# Altium PCB AudioPCB.PcbDoc (part 1 of 2)
Units mm, origin at the board's own origin, x right, y up, seen from the top; angles counter-clockwise.
Board outline 80 x 60 mm, 4 copper layers (Top Layer, GND, Power, Bottom Layer), stack 1.586 mm thick; 193 components, 130 nets, 539 pads, 148 vias.
Unrouted connection lines stored in the file: 1.
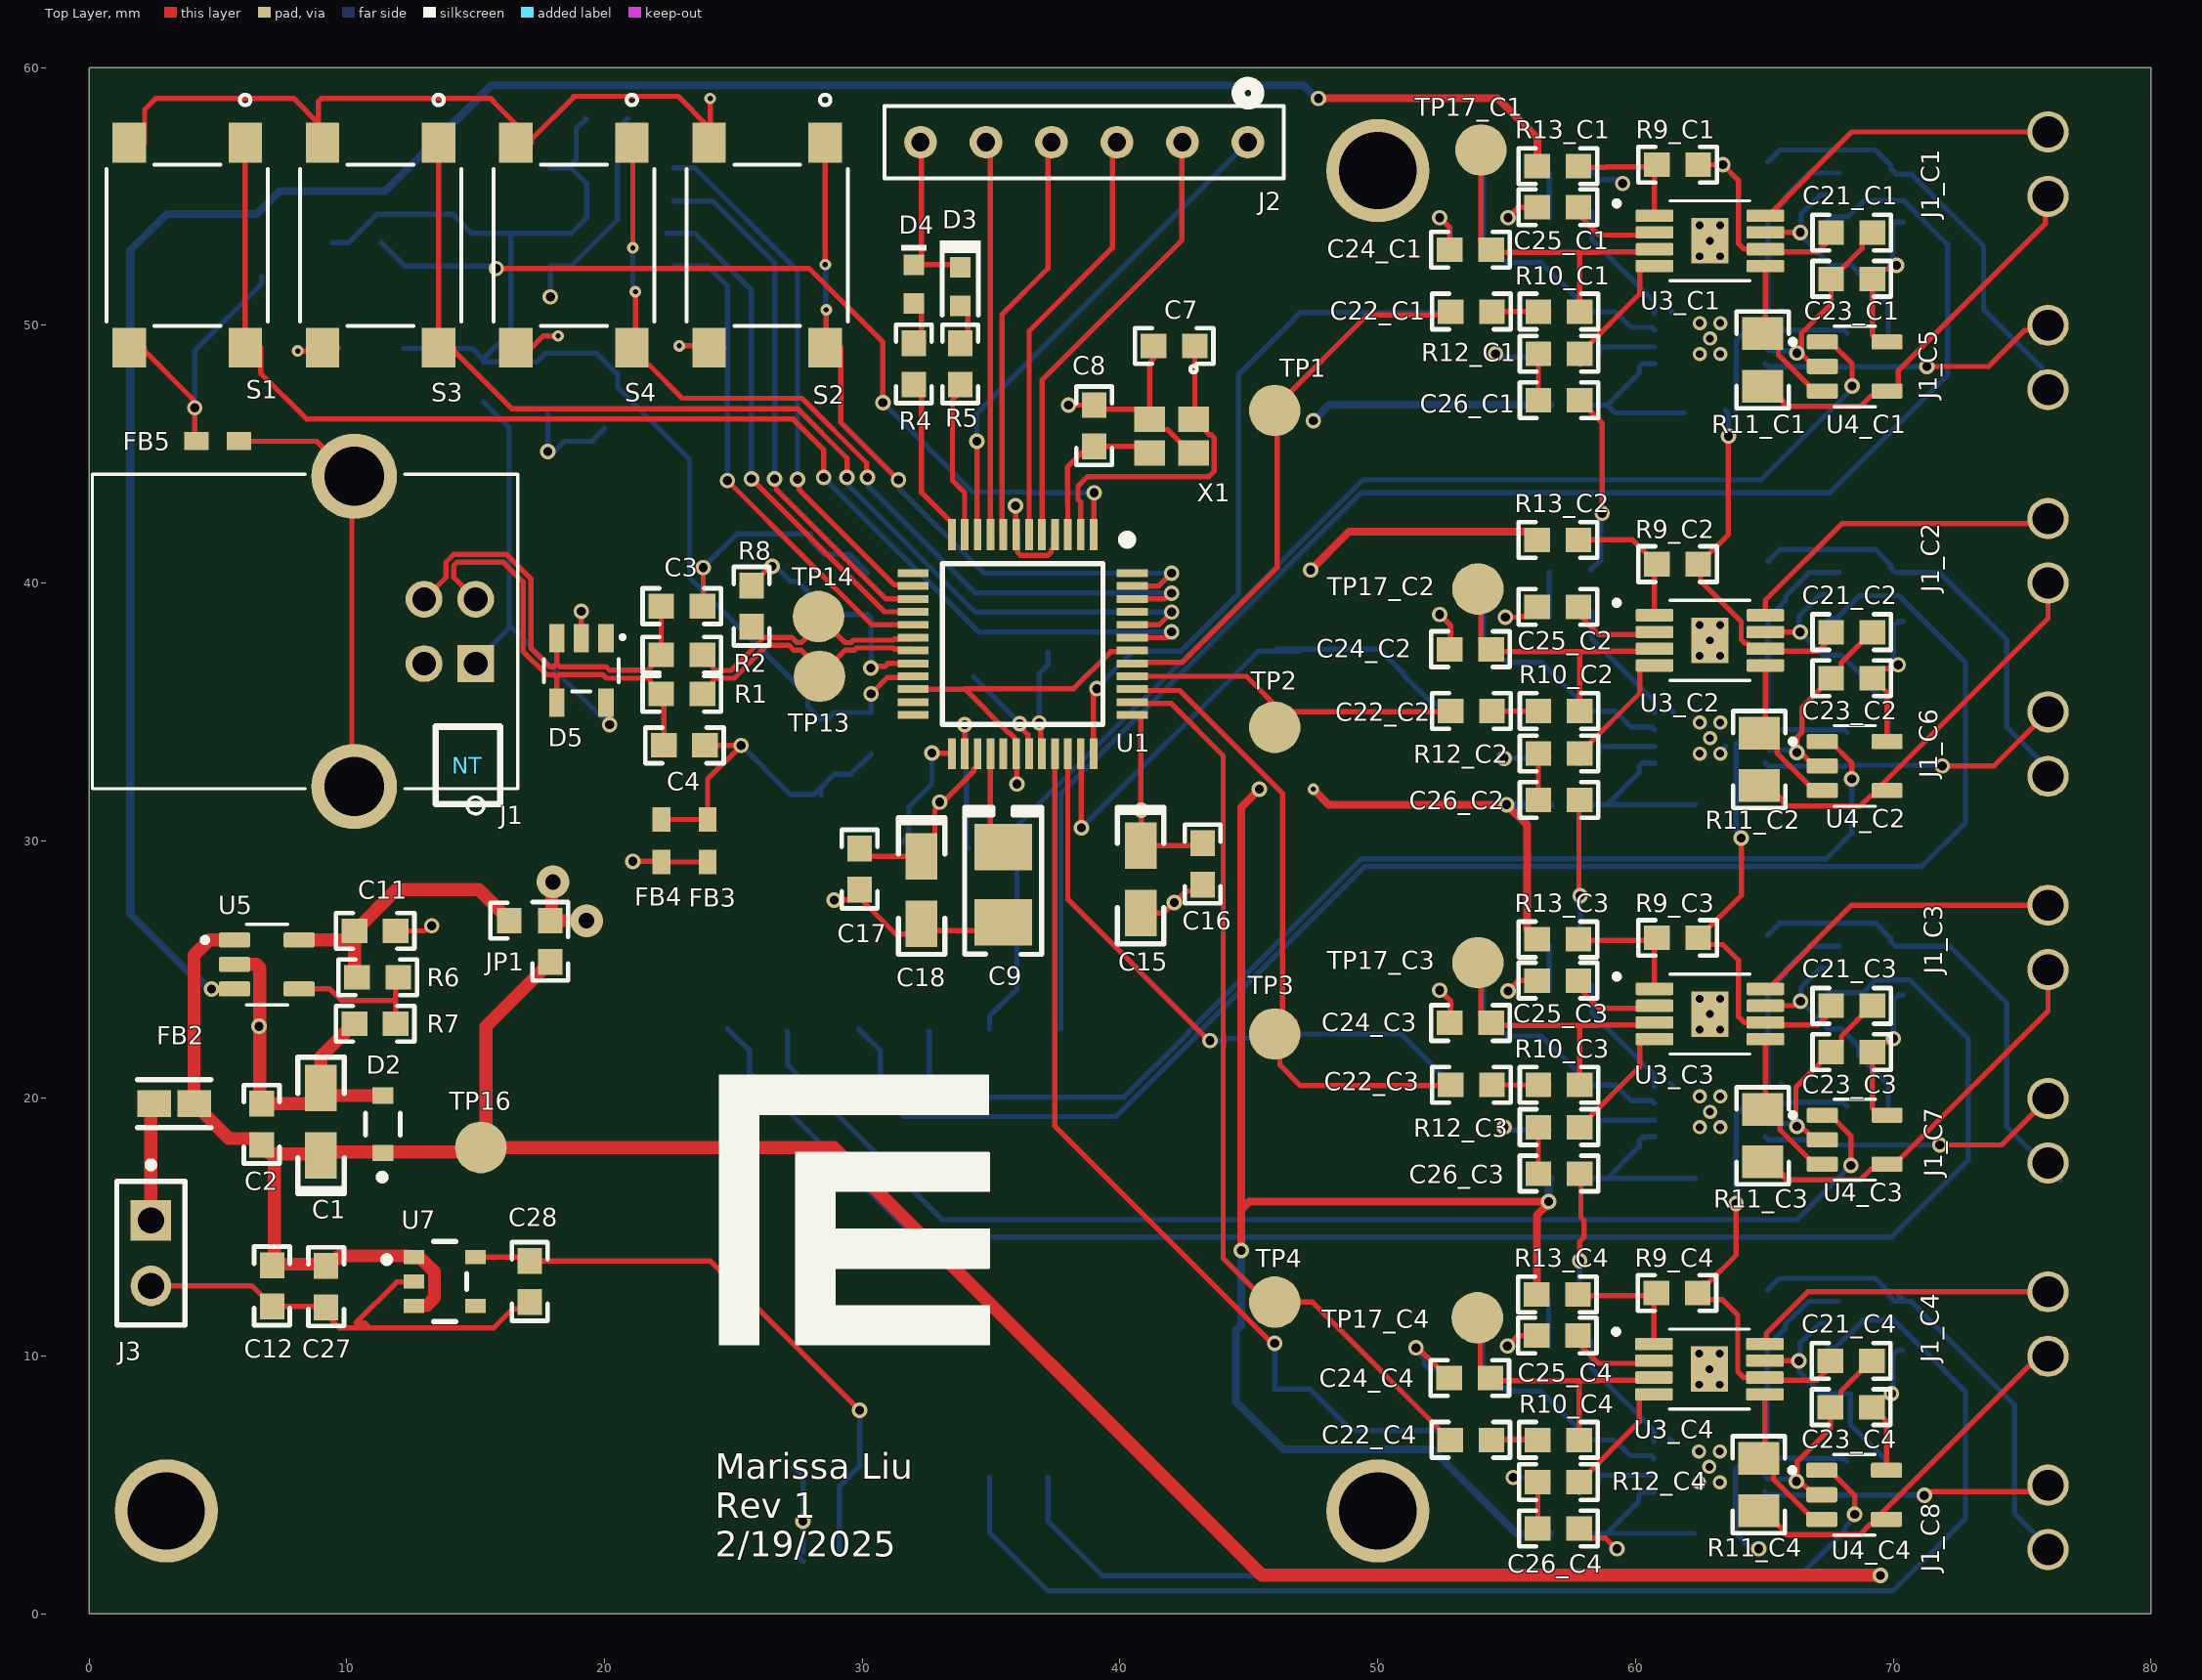
[diagram p0: Top Layer view]
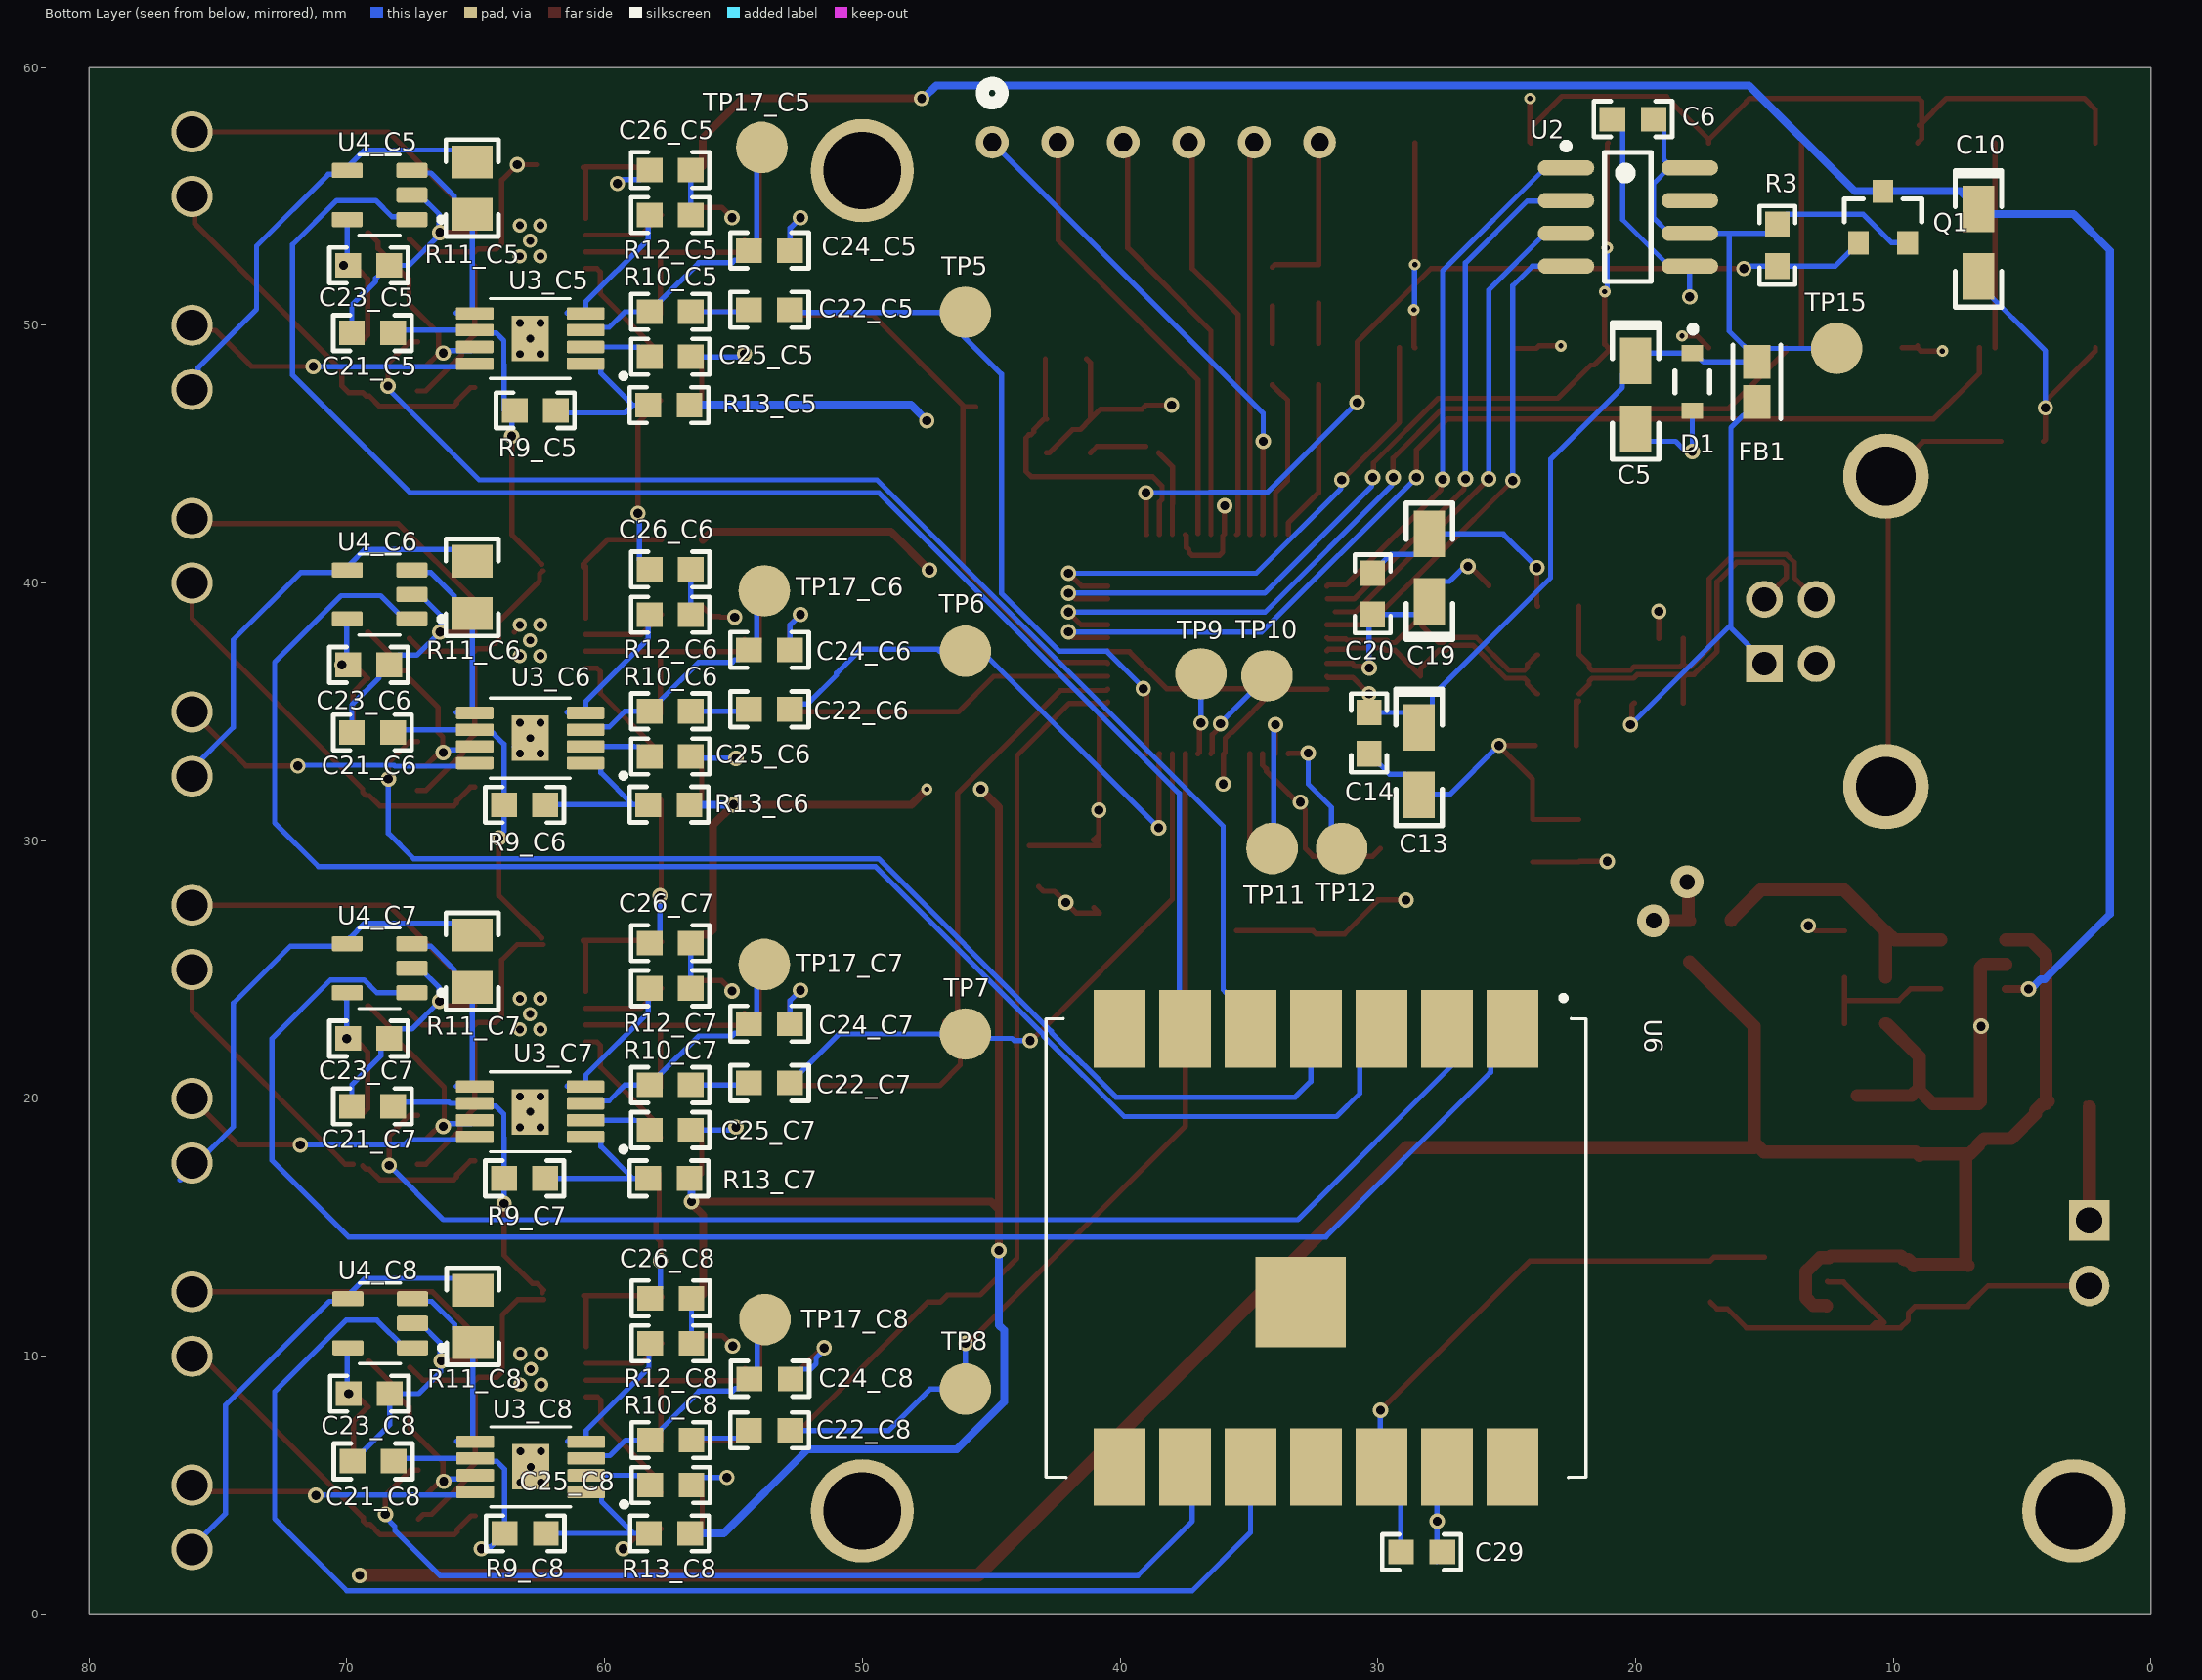
[diagram p1: Bottom Layer view, seen from below]
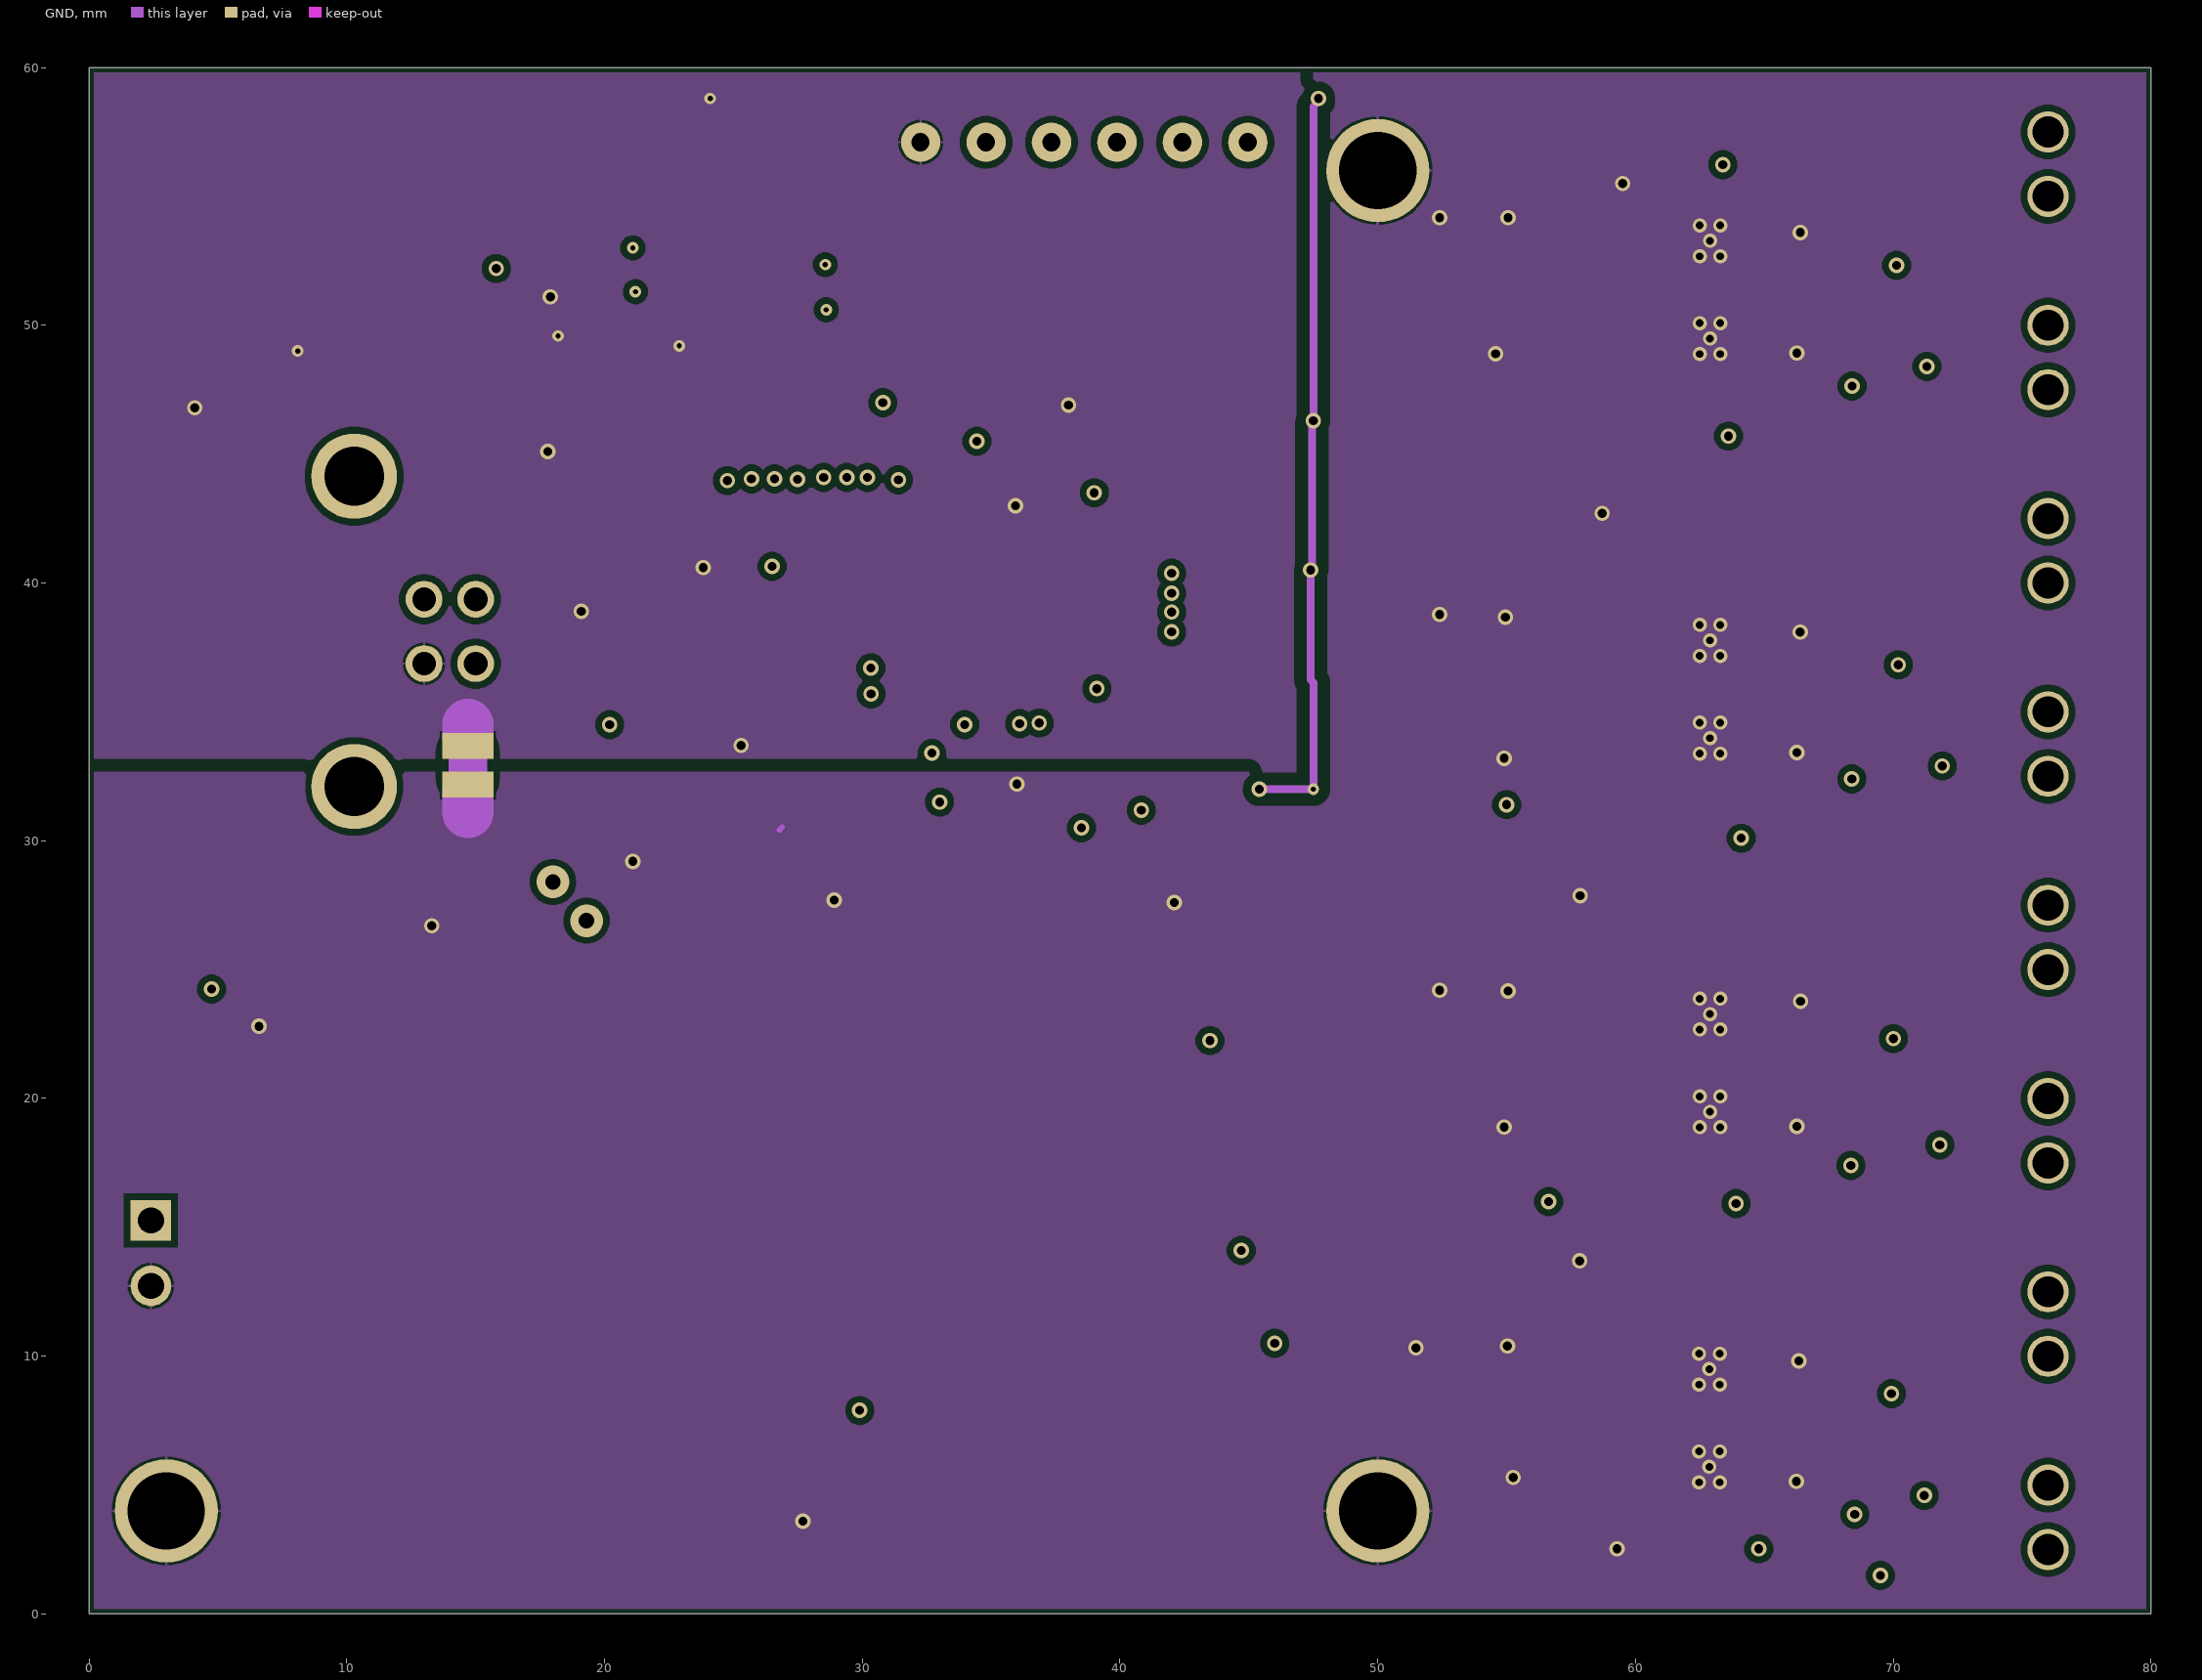
[diagram p2: GND]
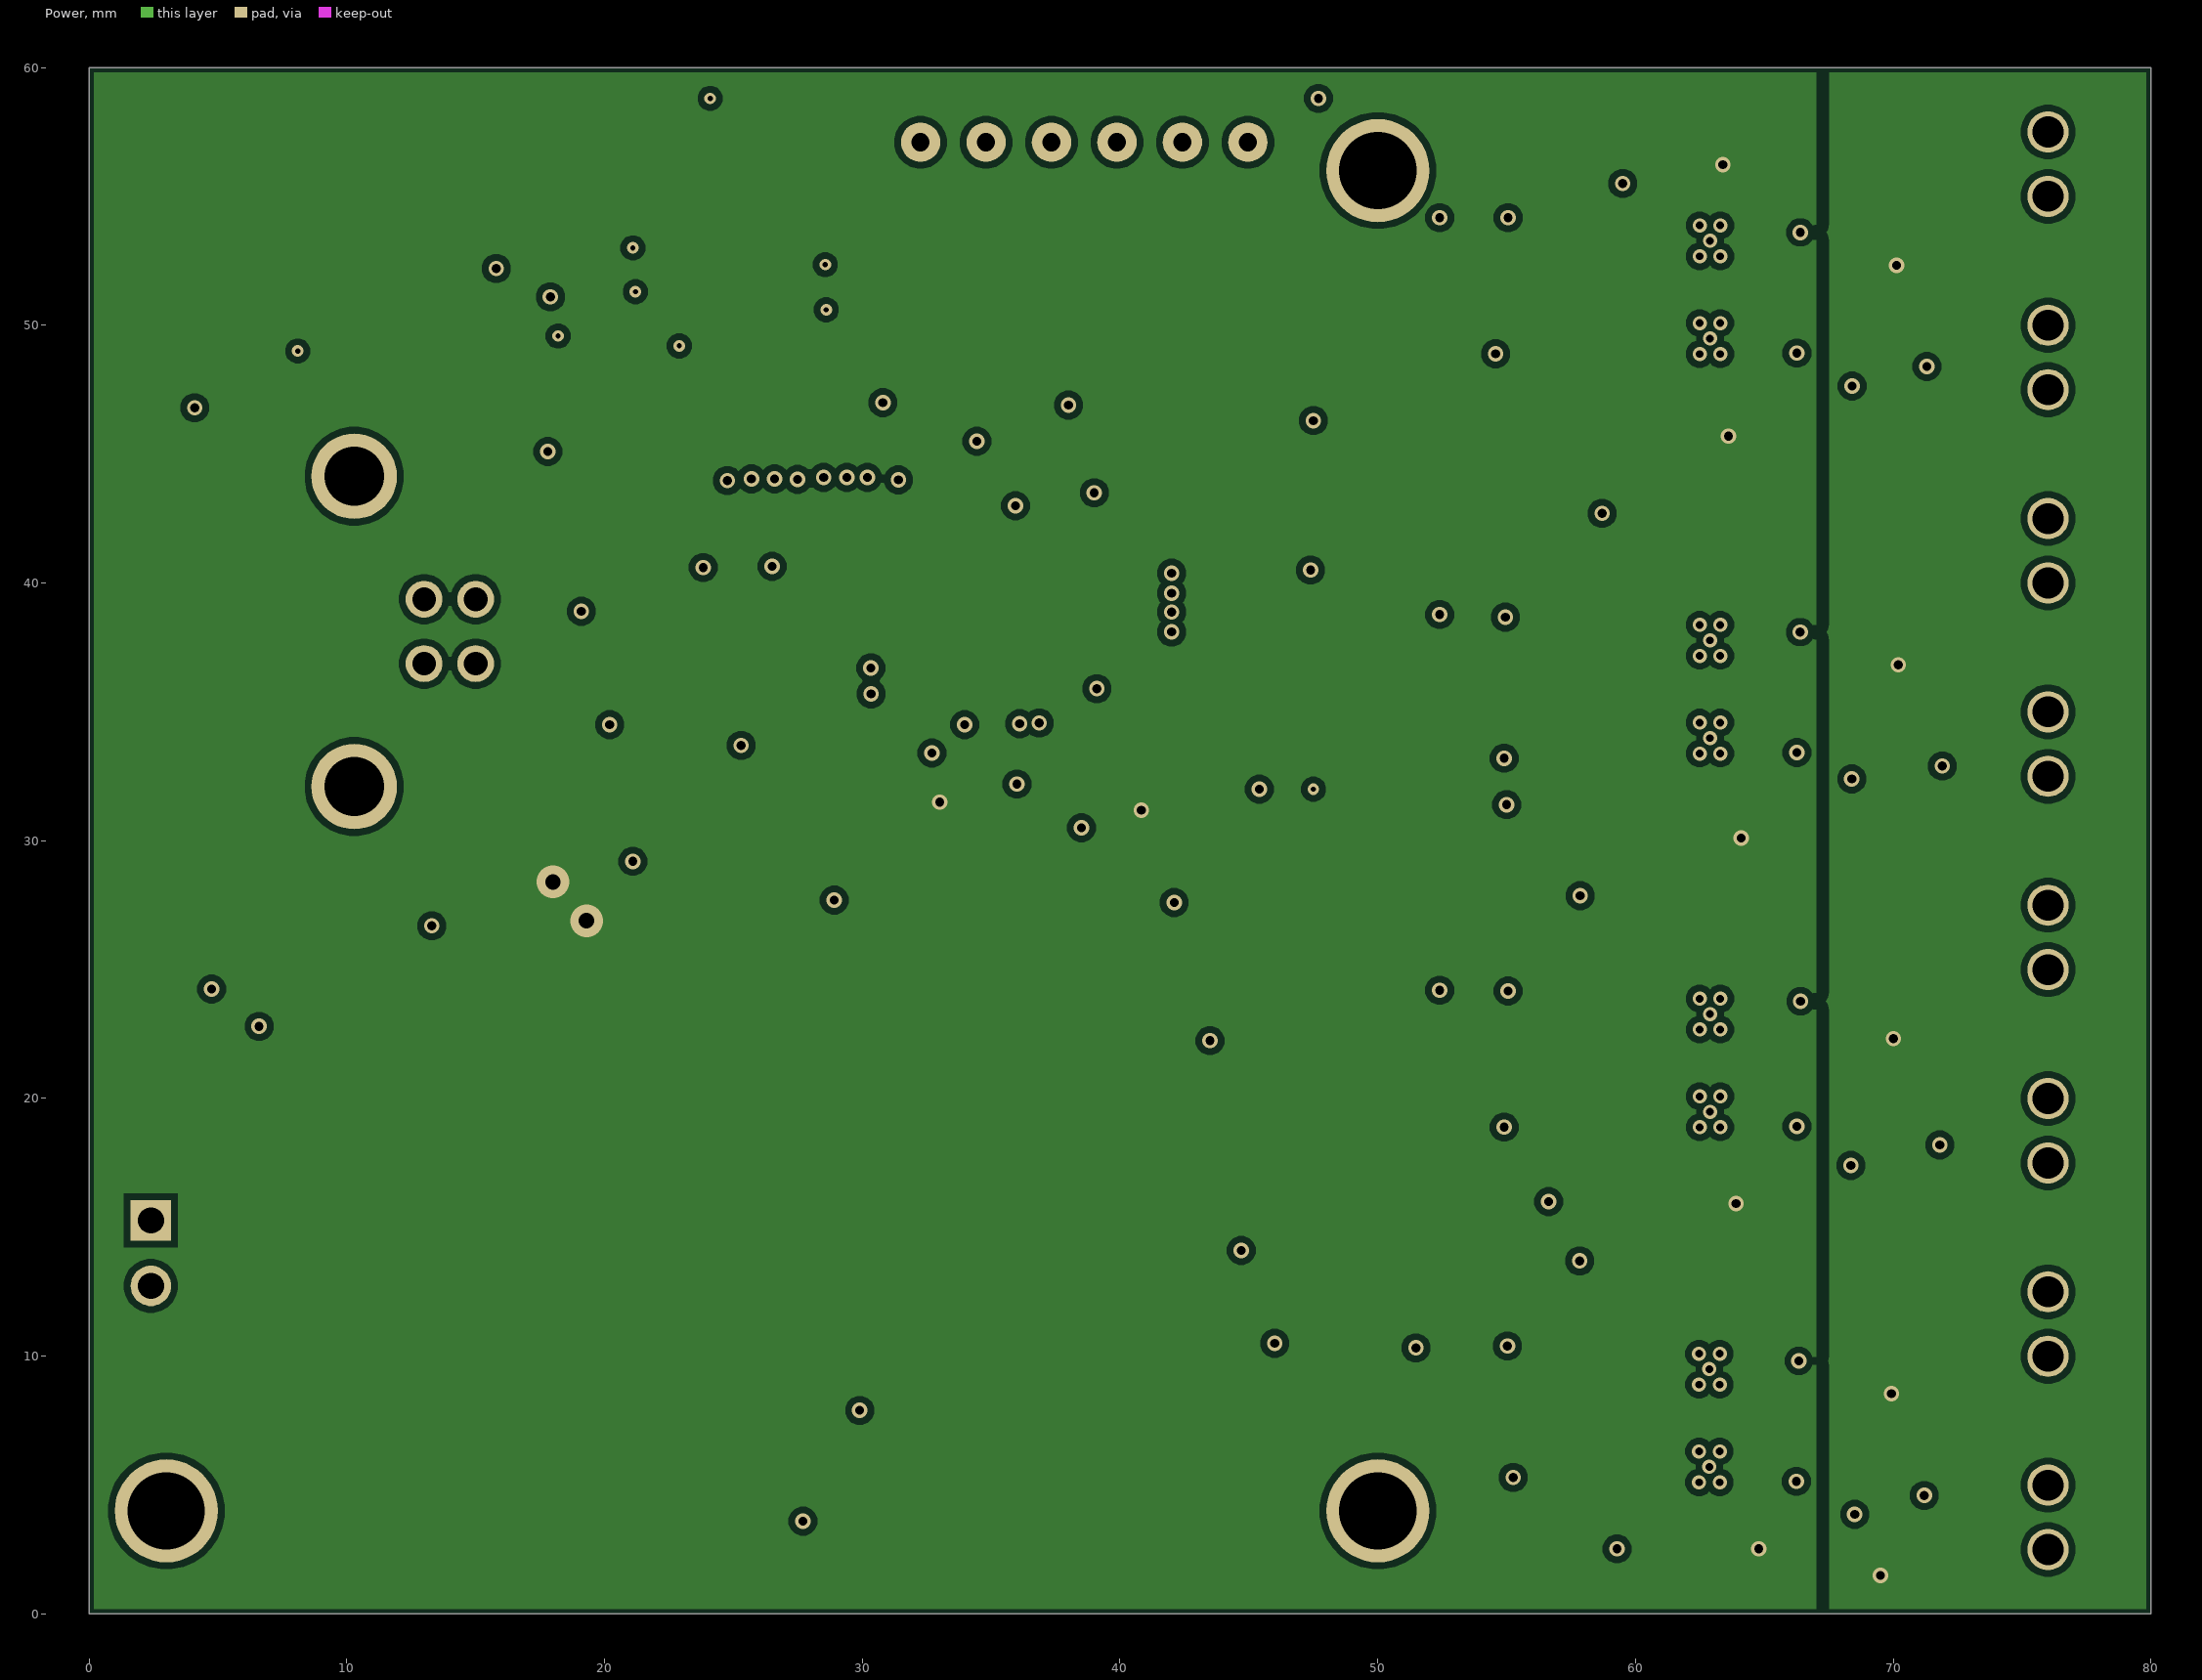
[diagram p3: Power]

## Layer stack, top to bottom
Top Solder: solder mask 0.0305, Solder Resist, Dk 3.8
Top Layer: signal copper 0.035
Dielectric 2: prepreg 0.2104, PP-006, Dk 4.4
GND: signal copper 0.0152
Dielectric 1: core 1.065, Dk 4.6
Power: signal copper 0.0152
Dielectric 3: prepreg 0.2104, PP-006, Dk 4.4
Bottom Layer: signal copper 0.035
Bottom Solder: solder mask 0.0305, Solder Resist, Dk 3.8

## Board outline
0,0 0,60 80,60 80,0

## Design rules (kind name [scope] priority, off if disabled: settings)
BoardOutlineClearance [All] p1: gap=0.2 ignorepadtopadclearanceinfootprint=FALSE
Clearance POLYGONCLEARANCE [InNamedPolygon('AVDD5V')or InNamedPolygon('AMP') or InNamedPolygon('AGND') or InNamedPolygon('DGND')] p1: gap=0.254 ignorepadtopadclearanceinfootprint=TRUE except(0: SMDPad-Fill SMDPad-Poly SMDPad-Region; 0.5: Arc-Fill Arc-Poly Arc-Region Track-Fill Track-Poly Track-Region Fill-Fill Fill-Poly Fill-Region Poly-Poly Poly-Region Region-Region)
Clearance [All] p2: gap=0.102 ignorepadtopadclearanceinfootprint=FALSE except(0.127: Arc-Via Track-Via SMDPad-Via THPad-Via Via-Via Via-Fill Via-Poly Via-Region Via-Text; 0.25: Arc-Hole Track-Hole SMDPad-Hole THPad-Hole Via-Hole Fill-Hole Poly-Hole Region-Hole Text-Hole)
ComponentClearance [All] p1: gap=0.102 collisioncheckmode=3 verticalgap=0.102 showdistances=TRUE
DiffPairsRouting [All] p1: maxlimit=0.102 minlimit=0.102 mostfreqgap=0.102 toplayer_minwidth=0.102 toplayer_maxwidth=1816.048 toplayer_prefwidth=0.102 midlayer1_minwidth=0.102 midlayer1_maxwidth=1816.048 midlayer1_prefwidth=0.102 midlayer2_minwidth=0.102 midlayer2_maxwidth=1816.048 midlayer2_prefwidth=0.102 bottomlayer_minwidth=0.102 bottomlayer_maxwidth=1816.048 bottomlayer_prefwidth=0.102 maxuncoupledlength=12.7
Height [All] p1: minheight=0 maxheight=1816.048 prefheight=12.7
HoleSize [All] p1: absolutevalues=TRUE maxlimit=6.3 minlimit=0.2 maxpercent=80.000 minpercent=20.000
HoleToHoleClearance [All] p1: gap=0.25 allowstackedmicrovias=FALSE
MinimumAnnularRing [All] p1: minimumring=0.076
MinimumSolderMaskSliver [All] p1: minsoldermaskwidth=0
PlaneClearance [All] p1: clearance=0.102
PlaneConnect PlaneConnectPowerPads [InPadClass('PowerPads')] p1: planeconnectstyle=Direct reliefexpansion=0.508 reliefentries=4 reliefconductorwidth=0.254 reliefairgap=0.254
PlaneConnect [All] p2: pad.planeconnectstyle=Relief pad.reliefexpansion=0.3 pad.reliefentries=4 pad.reliefconductorwidth=0.102 pad.reliefairgap=0.102 via.planeconnectstyle=Direct via.reliefexpansion=0.3 via.reliefentries=4 via.reliefconductorwidth=0.127 via.reliefairgap=0.127
PolygonConnect PolygonConnectPowerPads [All vs (InPadClass('PowerPads'))] p1: connectstyle=Direct reliefconductorwidth=0.254 reliefentries=4 polygonreliefangle="90 Angle" airgapwidth=0.254
PolygonConnect [All] p2: thpad.connectstyle=Relief thpad.reliefconductorwidth=0.102 thpad.reliefentries=4 thpad.polygonreliefangle="90 Angle" thpad.airgapwidth=0.102 smdpad.connectstyle=Relief smdpad.reliefconductorwidth=0.102 smdpad.reliefentries=4 smdpad.polygonreliefangle="90 Angle" smdpad.airgapwidth=0.102 via.connectstyle=Direct via.reliefconductorwidth=0.127 via.reliefentries=4 via.polygonreliefangle="90 Angle" via.airgapwidth=0.127
RoutingVias [All] p1: holewidth=0.2 width=0.45 viastyle="Through Hole" minholewidth=0.2 minwidth=0.45 maxholewidth=6.3 maxwidth=6.55
SMDToPlane [InNet('No Net')] p1: distance=0
SilkToSilkClearance [All] p1: silktosilkclearance=0
SilkToSolderMaskClearance [IsPad] p1: minsilkscreentomaskgap=0.102 clearancetoexposedcopper=TRUE
SolderMaskExpansion [All] p1: expansion=0.075 istentingtop=FALSE
SupplyNets "Schematic Supply Nets_7" [InNet('DGND')] p1: voltage=0.000
SupplyNets "Schematic Supply Nets_6" [InNet('AVDD5V')] p2: voltage=0.000
SupplyNets "Schematic Supply Nets_5" [InNet('4V')] p3: voltage=0.000
SupplyNets "Schematic Supply Nets_3" [InNet('AMP')] p4: voltage=0.000
SupplyNets "Schematic Supply Nets_2" [InNet('3V3')] p5: voltage=0.000
SupplyNets "Schematic Supply Nets_1" [InNet('DVDD5V')] p6: voltage=0.000
SupplyNets "Schematic Supply Nets" [InNet('AGND')] p7: voltage=0.000
Width [All] p1: maxlimit=1816.048 minlimit=0.102 preferedwidth=0.102
20 further rules are at their usual default settings.

## Classes and differential pairs
channel class "AB Amplifier": C1 C2 C3 C4 C5 C6 C7 C8
net class LINE_OUT[1..8]: LINE_OUT1 LINE_OUT2 LINE_OUT3 LINE_OUT4 LINE_OUT5 LINE_OUT6 LINE_OUT7 LINE_OUT8
net class CUR_SENSE[1..8]: CUR_SENSE1 CUR_SENSE2 CUR_SENSE3 CUR_SENSE4 CUR_SENSE5 CUR_SENSE6 CUR_SENSE7 CUR_SENSE8
component class USB: C1 C2 C3 C4 C5 D1 D2 D5 FB1 FB2 FB3 FB4 FB5 J1 J3 R1 R2 R8 TP13 TP14
component class Power: C10 C11 C12 C27 C28 JP1 Q1 R3 R6 R7 TP15 TP16 U5 U7
component class Designator: C29 U6
component class CM6206: C6 C7 C8 C9 C13 C14 C15 C16 C17 C18 C19 C20 D3 D4 J2 NT R4 R5 S1 S2 S3 S4 TP1 TP2 TP3 TP4 TP5 TP6 TP7 TP8 TP9 TP10 TP11 TP12 U1 U2 X1
component class C8: C21_C8 C22_C8 C23_C8 C24_C8 C25_C8 C26_C8 J1_C8 R9_C8 R10_C8 R11_C8 R12_C8 R13_C8 TP17_C8 U3_C8 U4_C8
component class C7: C21_C7 C22_C7 C23_C7 C24_C7 C25_C7 C26_C7 J1_C7 R9_C7 R10_C7 R11_C7 R12_C7 R13_C7 TP17_C7 U3_C7 U4_C7
component class C6: C21_C6 C22_C6 C23_C6 C24_C6 C25_C6 C26_C6 J1_C6 R9_C6 R10_C6 R11_C6 R12_C6 R13_C6 TP17_C6 U3_C6 U4_C6
component class C5: C21_C5 C22_C5 C23_C5 C24_C5 C25_C5 C26_C5 J1_C5 R9_C5 R10_C5 R11_C5 R12_C5 R13_C5 TP17_C5 U3_C5 U4_C5
component class C4: C21_C4 C22_C4 C23_C4 C24_C4 C25_C4 C26_C4 J1_C4 R9_C4 R10_C4 R11_C4 R12_C4 R13_C4 TP17_C4 U3_C4 U4_C4
component class C3: C21_C3 C22_C3 C23_C3 C24_C3 C25_C3 C26_C3 J1_C3 R9_C3 R10_C3 R11_C3 R12_C3 R13_C3 TP17_C3 U3_C3 U4_C3
component class C2: C21_C2 C22_C2 C23_C2 C24_C2 C25_C2 C26_C2 J1_C2 R9_C2 R10_C2 R11_C2 R12_C2 R13_C2 TP17_C2 U3_C2 U4_C2
component class C1: C21_C1 C22_C1 C23_C1 C24_C1 C25_C1 C26_C1 J1_C1 R9_C1 R10_C1 R11_C1 R12_C1 R13_C1 TP17_C1 U3_C1 U4_C1
differential pair USB_RAW: +USB_RAW_P -USB_RAW_N
differential pair USB: +USB_P -USB_N

## Components (designator, comment, footprint, x,y, rotation, side; value= is the part's Value field where it differs from the comment)
C1 "10µF" "1206 TANT CASE A" 9,19.1 r90 top
C2 "0.1uF" 0603 6.7,19 r270 top
C3 "0.1uF" 0603 23,39.1 r180 top
C4 "0.1uF" 0603 23.1,33.7 r180 top
C5 "10µF" "1206 TANT CASE A" 20,47.3 r270 bottom
C6 ".1uF" 0603 20.1,58 r180 bottom
C7 "6pF" 0603 42.1,49.2 r0 top
C8 "6pF" 0603 39,46.1 r270 top
C9 "22 µF" "CAP POL 1411_3528" 35.473,28.3 r270 top
C10 "10µF" "1206 TANT CASE A" 6.7,53.2 r270 bottom
C11 "2.2uF" 0603 11.1,26.5 r180 top
C12 "1uF" 0603 7.1,12.73 r90 top
C13 "10µF" "1206 TANT CASE A" 28.4,33.09 r270 bottom
C14 "0.1uF" 0603 30.342,34.178 r90 bottom
C15 "10uF" "1206 TANT CASE A" 40.8,28.5 r270 top
C16 "0.1uF" 0603 43.2,29.1 r90 top
C17 "0.1uF" 0603 29.9,28.9 r90 top
C18 "10uF" "1206 TANT CASE A" 32.3,28.09 r270 top
C19 "10µF" "1206 TANT CASE A" 28,40.6 r90 bottom
C20 "0.1uF" 0603 30.2,39.58 r270 bottom
C21_C1 "1uF" 0603 68.385,53.594 r180 top (schematic designator C21)
C21_C2 "1uF" 0603 68.385,38.094 r180 top (schematic designator C21)
C21_C3 "1uF" 0603 68.385,23.594 r180 top (schematic designator C21)
C21_C4 "1uF" 0603 68.363,9.82 r180 top (schematic designator C21)
C21_C5 "1uF" 0603 69,49.7 r180 bottom (schematic designator C21)
C21_C6 "1uF" 0603 69,34.2 r180 bottom (schematic designator C21)
C21_C7 "1uF" 0603 69,19.7 r180 bottom (schematic designator C21)
C21_C8 "1uF" 0603 68.978,5.926 r180 bottom (schematic designator C21)
C22_C1 "1uF" 0603 53.629,50.531 r0 top (schematic designator C22)
C22_C2 "1uF" 0603 53.629,35.031 r0 top (schematic designator C22)
C22_C3 "1uF" 0603 53.629,20.531 r0 top (schematic designator C22)
C22_C4 "1uF" 0603 53.607,6.756 r0 top (schematic designator C22)
C22_C5 "1uF" 0603 53.6,50.6 r0 bottom (schematic designator C22)
C22_C6 "1uF" 0603 53.6,35.1 r0 bottom (schematic designator C22)
C22_C7 "1uF" 0603 53.6,20.6 r0 bottom (schematic designator C22)
C22_C8 "1uF" 0603 53.593,7.124 r0 bottom (schematic designator C22)
C23_C1 "1uF" 0603 68.385,51.8 r0 top (schematic designator C23)
C23_C2 "1uF" 0603 68.385,36.3 r0 top (schematic designator C23)
C23_C3 "1uF" 0603 68.385,21.8 r0 top (schematic designator C23)
C23_C4 "1uF" 0603 68.363,8.026 r0 top (schematic designator C23)
C23_C5 "1uF" 0603 69.15,52.325 r0 bottom (schematic designator C23)
C23_C6 "1uF" 0603 69.15,36.825 r0 bottom (schematic designator C23)
C23_C7 "1uF" 0603 69.15,22.325 r0 bottom (schematic designator C23)
C23_C8 "1uF" 0603 69.128,8.551 r0 bottom (schematic designator C23)
C24_C1 "1uF" 0603 53.593,52.931 r0 top (schematic designator C24)
C24_C2 "1uF" 0603 53.593,37.431 r0 top (schematic designator C24)
C24_C3 "1uF" 0603 53.593,22.931 r0 top (schematic designator C24)
C24_C4 "1uF" 0603 53.57,9.156 r0 top (schematic designator C24)
C24_C5 "1uF" 0603 53.6,52.9 r0 bottom (schematic designator C24)
C24_C6 "1uF" 0603 53.6,37.4 r0 bottom (schematic designator C24)
C24_C7 "1uF" 0603 53.6,22.9 r0 bottom (schematic designator C24)
C24_C8 "1uF" 0603 53.578,9.126 r0 bottom (schematic designator C24)
C25_C1 "1uF" 0603 56.985,54.574 r0 top (schematic designator C25)
C25_C2 "1uF" 0603 56.985,39.074 r0 top (schematic designator C25)
C25_C3 "1uF" 0603 56.985,24.574 r0 top (schematic designator C25)
C25_C4 "1uF" 0603 56.963,10.8 r0 top (schematic designator C25)
C25_C5 "1uF" 0603 57.45,48.775 r0 bottom (schematic designator C25)
C25_C6 "1uF" 0603 57.45,33.275 r0 bottom (schematic designator C25)
C25_C7 "1uF" 0603 57.45,18.775 r0 bottom (schematic designator C25)
C25_C8 "1uF" 0603 57.428,5.001 r0 bottom (schematic designator C25)
C26_C1 "1uF" 0603 57.029,47.088 r180 top (schematic designator C26)
C26_C2 "1uF" 0603 57.029,31.588 r180 top (schematic designator C26)
C26_C3 "1uF" 0603 57.029,17.088 r180 top (schematic designator C26)
C26_C4 "1uF" 0603 57.007,3.314 r180 top (schematic designator C26)
C26_C5 "1uF" 0603 57.45,56.025 r180 bottom (schematic designator C26)
C26_C6 "1uF" 0603 57.45,40.525 r180 bottom (schematic designator C26)
C26_C7 "1uF" 0603 57.45,26.025 r180 bottom (schematic designator C26)
C26_C8 "1uF" 0603 57.428,12.251 r180 bottom (schematic designator C26)
C27 "1uF" 0603 9.2,12.7 r90 top
C28 "1uF" 0603 17.1,12.9 r90 top
C29 "1uF" 0603 28.3,2.4 r0 bottom
D1 "MM3Z5V6ST1G" FP-477-02-MFG 17.8,47.8 r270 bottom
D2 "MM3Z5V6ST1G" FP-477-02-MFG 11.4,19 r90 top
D3 "LTST-C190KGKT" LED_LTST-C190 33.8,51.5 r90 top
D4 "LB Q39G-L2OO-35-1" "LB Q39G_BLUE" 32,51.6 r90 top
D5 "5V" WE-TVS_SOT23-5L 19.1,36.6 r180 top
FB1 "BLM18KG601SN1D" FP-BLM18-0_15-t0_8-IPC_A 15.3,47.8 r90 bottom
FB2 "BLM18KG601SN1D" FP-BLM18-0_15-t0_8-IPC_A 3.3,19.8 r0 top
FB3 "742792609" WE-CBF_0603_L1.6W0.8H0.8_HC 24,30 r270 top
FB4 "742792609" WE-CBF_0603_L1.6W0.8H0.8_HC 22.2,30 r270 top
FB5 "742792609" WE-CBF_0603_L1.6W0.8H0.8_HC 5,45.5 r0 top
J1 "UJ2-BH-W1-TH" CUI_UJ2-BH-W1-TH 15,36.87 r270 top
J1_C1 "1881558" 1881558 76,56.25 r90 top (schematic designator J1)
J1_C2 "1881558" 1881558 76,41.25 r90 top (schematic designator J1)
J1_C3 "1881558" 1881558 76,26.25 r90 top (schematic designator J1)
J1_C4 "1881558" 1881558 76,11.25 r90 top (schematic designator J1)
J1_C5 "1881558" 1881558 76,48.75 r90 top (schematic designator J1)
J1_C6 "1881558" 1881558 76,33.75 r90 top (schematic designator J1)
J1_C7 "1881558" 1881558 76,18.75 r90 top (schematic designator J1)
J1_C8 "1881558" 1881558 76,3.75 r90 top (schematic designator J1)
J2 "TS-106-T-A" CON6_1X6_TU_HTS_SAI 38.61,57.1 r180 top
J3 "M20-9990246" FP-M20-9990246-MFG 2.4,14 r270 top
JP1 "2 way jumper" "0603 2 way jumper" 17.9,26.1 r90 top
NT "NetTie" NetTie 14.7,32.424 r270 top net-tie
Q1 "DMG2301L-7" FP-SOT23-MFG 10.4,54.2 r90 bottom
R1 "22" 0603 23,35.7 r0 top
R2 "22" 0603 23,37.216 r0 top
R3 "1k" 0603 14.5,53.1 r90 bottom
R4 "330" 0603 32,48.5 r270 top
R5 "330" 0603 33.8,48.5 r270 top
R6 "63.4k" 0603 11.2,24.7 r180 top
R7 "10k" 0603 11.1,22.9 r0 top
R8 "1.5k" 0603 25.7,39.1 r270 top
R9_C1 "20k" 0603 61.629,56.231 r0 top (schematic designator R9)
R9_C2 "20k" 0603 61.629,40.731 r0 top (schematic designator R9)
R9_C3 "20k" 0603 61.629,26.231 r0 top (schematic designator R9)
R9_C4 "20k" 0603 61.607,12.456 r0 top (schematic designator R9)
R9_C5 "20k" 0603 62.685,46.7 r0 bottom (schematic designator R9)
R9_C6 "20k" 0603 63.1,31.4 r0 bottom (schematic designator R9)
R9_C7 "20k" 0603 63.1,16.9 r0 bottom (schematic designator R9)
R9_C8 "20k" 0603 63.078,3.126 r0 bottom (schematic designator R9)
R10_C1 "20k" 0603 57.029,50.531 r0 top (schematic designator R10)
R10_C2 "20k" 0603 57.029,35.031 r0 top (schematic designator R10)
R10_C3 "20k" 0603 57.029,20.531 r0 top (schematic designator R10)
R10_C4 "20k" 0603 57.007,6.756 r0 top (schematic designator R10)
R10_C5 "20k" 0603 57.45,50.525 r0 bottom (schematic designator R10)
R10_C6 "20k" 0603 57.45,35.025 r0 bottom (schematic designator R10)
R10_C7 "20k" 0603 57.45,20.525 r0 bottom (schematic designator R10)
R10_C8 "20k" 0603 57.428,6.751 r0 bottom (schematic designator R10)
R11_C1 "0.25" 0805_HV 64.931,48.656 r90 top (schematic designator R11)
R11_C2 "0.25" 0805_HV 64.8,33.156 r90 top (schematic designator R11)
R11_C3 "0.25" 0805_HV 64.931,18.555 r90 top (schematic designator R11)
R11_C4 "0.25" 0805_HV 64.778,5.021 r90 top (schematic designator R11)
R11_C5 "0.25" 0805_HV 65.134,55.325 r270 bottom (schematic designator R11)
R11_C6 "0.25" 0805_HV 65.134,39.825 r270 bottom (schematic designator R11)
R11_C7 "0.25" 0805_HV 65.134,25.325 r270 bottom (schematic designator R11)
R11_C8 "0.25" 0805_HV 65.112,11.551 r270 bottom (schematic designator R11)
R12_C1 "20k" 0603 57.029,48.888 r0 top (schematic designator R12)
R12_C2 "20k" 0603 57.029,33.388 r0 top (schematic designator R12)
R12_C3 "20k" 0603 57.029,18.888 r0 top (schematic designator R12)
R12_C4 "20k" 0603 57.007,5.114 r0 top (schematic designator R12)
R12_C5 "20k" 0603 57.45,54.275 r0 bottom (schematic designator R12)
R12_C6 "20k" 0603 57.45,38.775 r0 bottom (schematic designator R12)
R12_C7 "20k" 0603 57.45,24.275 r0 bottom (schematic designator R12)
R12_C8 "20k" 0603 57.428,10.501 r0 bottom (schematic designator R12)
R13_C1 "0" 0603 56.985,56.174 r180 top (schematic designator R13)
R13_C2 "0" 0603 56.985,41.674 r180 top (schematic designator R13)
R13_C3 "0" 0603 56.985,26.174 r180 top (schematic designator R13)
R13_C4 "0" 0603 56.963,12.4 r180 top (schematic designator R13)
R13_C5 "0" 0603 57.5,46.9 r180 bottom (schematic designator R13)
R13_C6 "0" 0603 57.5,31.4 r180 bottom (schematic designator R13)
R13_C7 "0" 0603 57.5,16.9 r180 bottom (schematic designator R13)
R13_C8 "0" 0603 57.478,3.126 r180 bottom (schematic designator R13)
S1 "B3S-1000" B3S-1000_OMR 3.811,53.102 r270 top
S2 "B3S-1000" B3S-1000_OMR 26.311,53.102 r270 top
S3 "B3S-1000" B3S-1000_OMR 11.311,53.102 r270 top
S4 "B3S-1000" B3S-1000_OMR 18.811,53.102 r270 top
TP1 "5001" "Testpoint pad"#1 47,46.691 r0 top
TP2 "5001" "Testpoint pad"#1 47,34.4 r0 top
TP3 "5001" "Testpoint pad"#1 47,22.5 r0 top
TP4 "5001" "Testpoint pad"#2 46.978,12.1 r0 top
TP5 "5001" "Testpoint pad"#3 47,50.5 r180 bottom
TP6 "5001" "Testpoint pad"#3 47,37.353 r180 bottom
TP7 "5001" "Testpoint pad"#4 47.1,22.5 r180 bottom
TP8 "5001" "Testpoint pad"#5 46.978,8.726 r180 bottom
TP9 "5001" "Testpoint pad"#6 36.863,36.477 r180 bottom
TP10 "5001" "Testpoint pad"#6 34.3,36.4 r90 bottom
TP11 "5001" "Testpoint pad"#6 34.1,29.7 r180 bottom
TP12 "5001" "Testpoint pad"#6 31.4,29.7 r90 bottom
TP13 "5001" "Testpoint pad"#6 28.344,36.38 r90 top
TP14 "5001" "Testpoint pad"#6 28.3,38.7 r90 top
TP15 "5001" "Testpoint pad"#6 12.2,49.1 r90 bottom
TP16 "5001" "Testpoint pad"#6 15.2,18.1 r90 top
TP17_C1 "5001" "Testpoint pad"#6 54,56.8 r90 top (schematic designator TP17)
TP17_C2 "5001" "Testpoint pad"#6 53.885,39.767 r90 top (schematic designator TP17)
TP17_C3 "5001" "Testpoint pad"#6 53.885,25.267 r90 top (schematic designator TP17)
TP17_C4 "5001" "Testpoint pad"#6 53.863,11.493 r90 top (schematic designator TP17)
TP17_C5 "5001" "Testpoint pad"#6 53.9,56.9 r90 bottom (schematic designator TP17)
TP17_C6 "5001" "Testpoint pad"#6 53.8,39.7 r90 bottom (schematic designator TP17)
TP17_C7 "5001" "Testpoint pad"#6 53.8,25.2 r90 bottom (schematic designator TP17)
TP17_C8 "5001" "Testpoint pad"#6 53.778,11.426 r90 bottom (schematic designator TP17)
U1 "CM6206" "CM6206 LQFP48" 36.4,37.58 r270 top locked
U2 "93C46C-I/SN" SOIC-SN8_N 20.3,54.2 r180 bottom
U3_C1 "TPA6211A1DGN" SOP65P490X110-9N 62.885,53.274 r0 top (schematic designator U3)
U3_C2 "TPA6211A1DGN" SOP65P490X110-9N 62.885,37.774 r0 top (schematic designator U3)
U3_C3 "TPA6211A1DGN" SOP65P490X110-9N 62.885,23.274 r0 top (schematic designator U3)
U3_C4 "TPA6211A1DGN" SOP65P490X110-9N 62.863,9.5 r0 top (schematic designator U3)
U3_C5 "TPA6211A1DGN" SOP65P490X110-9N 62.885,49.483 r0 bottom (schematic designator U3)
U3_C6 "TPA6211A1DGN" SOP65P490X110-9N 62.885,33.983 r0 bottom (schematic designator U3)
U3_C7 "TPA6211A1DGN" SOP65P490X110-9N 62.885,19.483 r0 bottom (schematic designator U3)
U3_C8 "TPA6211A1DGN" SOP65P490X110-9N 62.863,5.709 r0 bottom (schematic designator U3)
U4_C1 "INA180A1IDBVT" SOT95P280X145-5N 68.5,48.4 r0 top (schematic designator U4)
U4_C2 "INA180A1IDBVT" SOT95P280X145-5N 68.5,32.9 r0 top (schematic designator U4)
U4_C3 "INA180A1IDBVT" SOT95P280X145-5N 68.5,18.4 r0 top (schematic designator U4)
U4_C4 "INA180A1IDBVT" SOT95P280X145-5N 68.478,4.626 r0 top (schematic designator U4)
U4_C5 "INA180A1IDBVT" SOT95P280X145-5N 68.726,55.053 r0 bottom (schematic designator U4)
U4_C6 "INA180A1IDBVT" SOT95P280X145-5N 68.726,39.553 r0 bottom (schematic designator U4)
U4_C7 "INA180A1IDBVT" SOT95P280X145-5N 68.726,25.053 r0 bottom (schematic designator U4)
U4_C8 "INA180A1IDBVT" SOT95P280X145-5N 68.704,11.279 r0 bottom (schematic designator U4)
U5 "TLV75801PDBVR" SOT95P280X145-5N 6.9,25.2 r0 top
U6 "113991054" 113991054 32.4,14.2 r270 bottom locked
U7 "AP2127K-3.3TRG1" FP-SOT25-MFG 13.8,12.9 r0 top
X1 "ECS-120-8-36-CKM-TR3" ECS-120-8_ECS 42,45.7 r270 top

## Footprints (in the part's own frame and the unit in brackets; to place one, negate y for a bottom-side part, rotate by r counter-clockwise, add the part's x,y. Pads: shape width x height; smd on the part's side, far side on the other; paste and mask are expansions set on the pad)
0603 [mm] "0603 from SM-752 data"
  rect 1x0.95 smd: 1(-0.8,0) 2(0.8,0)
  silkscreen extent -1.52,-0.69 1.52,0.69, body extent -0.87,-0.47 0.87,0.47, height 0.85
"0603 2 way jumper" [mm] "resistor 2 way jumper"
  rect 1x0.95 smd: 1(-0.8,0) 2(0.8,0) 3(0.8,1.6)
  silkscreen extent -1.52,-0.69 1.52,2.32
0805_HV [mil] "0805 with 30mil clearance between pads"
  rect 50x63 smd: 1(-40,0) 2(40,0)
  silkscreen extent -74,-40 74,40, body extent -43,-29 43,29, height 43
"1206 TANT CASE A" [mm] "TANTALUM CASE A"
  rect 1.8x1.23 smd: 1(1.31,0) 2(-1.31,0)
  silkscreen extent -2.8,-1 2.5,1, body extent -1.7,-0.8 1.7,0.8, height 1.6
1881558 [mm]
  round 1.6 hole 1.2: 1(-1.25,0) 2(1.25,0)
  body extent -3.45,-4.2 3.45,3.9, height 10.11
113991054 [mm]
  rect 3x2 smd mask+0.05: 1(-8.5,7.62) 2(-8.5,5.08) 3(-8.5,2.54) 4(-8.5,0) 5(-8.5,-2.54) 6(-8.5,-5.08) 7(-8.5,-7.62) 8(8.5,-7.62) 9(8.5,-5.08) 10(8.5,-2.54) 11(8.5,0) 12(8.5,2.54) 13(8.5,5.08) 14(8.5,7.62)
  rect 3.5x3.5 smd: 39(2.1,-0.6)
  silkscreen extent -9.8,-10.48 8.9,10.48
B3S-1000_OMR [mm]
  rect 1.549x1.295 smd paste+0 mask+0: 1(-3.975,2.25) 2(3.975,2.25) 3(-3.975,-2.25) 4(3.975,-2.25)
  silkscreen extent -5.84,-3.12 3.12,3.12
"CAP POL 1411_3528" [mm] "Molded Capacitor, 2-Leads, Body 3.50x2.80mm, IPC Medium Density"
  rect 1.8x2.23 smd: 1(-1.46,0) 2(1.46,0)
  silkscreen extent -3,-1.5 2.71,1.48, body extent -1.87,-1.45 1.86,1.45, height 2
"CM6206 LQFP48" [mm]
  rect 1.2x0.3 smd: 1(-4.3,2.573) 2(-4.3,2.073) 3(-4.3,1.573) 4(-4.3,1.073) 5(-4.3,0.573) 6(-4.3,0.073) 7(-4.3,-0.427) 8(-4.3,-0.927) 9(-4.3,-1.427) 10(-4.3,-1.927) 11(-4.3,-2.427) 12(-4.3,-2.927) 25(4.2,-2.927) 26(4.2,-2.427) 27(4.2,-1.927) 28(4.2,-1.427) 29(4.2,-0.927) 30(4.2,-0.427) 31(4.2,0.073) 32(4.2,0.573) 33(4.2,1.073) 34(4.2,1.573) 35(4.2,2.073) 36(4.2,2.573)
  rect 0.3x1.2 smd: 13(-2.8,-4.427) 14(-2.3,-4.427) 15(-1.8,-4.427) 16(-1.3,-4.427) 17(-0.8,-4.427) 18(-0.3,-4.427) 19(0.2,-4.427) 20(0.7,-4.427) 21(1.2,-4.427) 22(1.7,-4.427) 23(2.2,-4.427) 24(2.7,-4.427) 37(2.7,4.073) 38(2.2,4.073) 39(1.7,4.073) 40(1.2,4.073) 41(0.7,4.073) 42(0.2,4.073) 43(-0.3,4.073) 44(-0.8,4.073) 45(-1.3,4.073) 46(-1.8,4.073) 47(-2.3,4.073) 48(-2.8,4.073)
  silkscreen extent -4.2,-3.29 3.06,3.97
CON6_1X6_TU_HTS_SAI [mil]
  round 50 / inner round 60 / far side round 50 hole 28 paste-99999 mask+0: 1(-250,0) 2(-150,0) 3(-50,0) 4(50,0) 5(150,0) 6(250,0)
  silkscreen extent -305,-90 305,55
CUI_UJ2-BH-W1-TH [mm]
  rect 1.428x1.428 / inner round 1.428 / far side rect 1.428x1.428 hole 0.92: 1(0,0)
  round 1.428 hole 0.92: 2(-2.5,0) 3(-2.5,-2) 4(0,-2)
  round 3.316 hole 2.3: SH1(-7.27,-4.71) SH2(4.77,-4.71)
  silkscreen extent -7.35,-14.87 5.83,1.63, body extent -8.7,-14.85 6.3,1.6, height 10.71
ECS-120-8_ECS [mm]
  rect 0.991x1.194 smd paste+0 mask+0: 1(-0.65,0.85) 2(-0.65,-0.85) 3(0.65,-0.85) 4(0.65,0.85)
  silkscreen extent -2.72,0.72 -2.47,0.98, body extent -1.05,-1.3 1.05,1.3, height 0.61
FP-477-02-MFG [mm]
  rect 0.63x0.83 smd paste+0 mask+0: 1(-1.115,0) 2(1.115,0)
  silkscreen extent -2.17,-0.67 0.43,0.67, body extent -1.25,-0.63 1.25,0.63, height 1.1
FP-BLM18-0_15-t0_8-IPC_A [mm]
  rect 1.306x1.058 smd paste+0 mask+0: 1(-0.776,0) 2(0.776,0)
  silkscreen extent -1.43,-0.93 1.43,0.93, body extent -0.8,-0.4 0.8,0.4, height 0.95
FP-M20-9990246-MFG [mm]
  rect 1.57x1.57 hole 1.02 paste-2539.97 mask+0: 1(-1.27,0)
  round 1.57 hole 1.02 paste-2539.97 mask+0: 2(1.27,0)
  silkscreen extent -3.55,-1.32 2.79,1.32, body extent -2.89,-1.42 2.89,1.42, height 0.25
FP-SOT23-MFG [mm]
  rect 0.9x0.8 smd paste+0 mask+0: 1(-1,0.95) 2(-1,-0.95) 3(1,0)
  silkscreen extent -0.18,-1.5 0.7,1.5, body extent -1.2,-1.45 1.2,1.45, height 1.1
FP-SOT25-MFG [mm]
  rect 0.8x0.55 smd paste+0 mask+0: 1(-1.2,0.95) 2(-1.2,0) 3(-1.2,-0.95) 4(1.2,-0.95) 5(1.2,0.95)
  silkscreen extent -2.37,-1.55 0.85,1.55, body extent -1.7,-1.65 1.7,1.65, height 0.25
"LB Q39G_BLUE" [mm] "OSRAM"
  rect 0.8x0.8 smd: 1(-0.75,0) 2(0.75,0)
  silkscreen extent 1.3,-0.5 1.52,0.5, body extent -0.85,-0.45 0.85,0.45, height 0.4
LED_LTST-C190 [mm] "Lite-On"
  rect 0.8x0.8 smd: 1(-0.75,0) 2(0.75,0)
  silkscreen extent -1.1,-0.8 1.8,0.8, body extent -0.85,-0.45 0.85,0.45, height 0.9
NetTie [mm] "Net Tie for EDGE"
  rect 1x2 on Mid1 paste+0 mask+0: 1(-1.25,0) 2(0.25,0)
  GND lines w1.5: 0,0 -1,0
  silkscreen extent -2,-1.25 1,1.25
SOIC-SN8_N [mm] "SOIC, 8-Leads, Body 4.9x3.9mm, Pitch 1.27mm, IPC Medium Density"
  oval 2.2x0.6 smd: 1(-2.4,1.905) 2(-2.4,0.635) 3(-2.4,-0.635) 4(-2.4,-1.905) 5(2.4,-1.905) 6(2.4,-0.635) 7(2.4,0.635) 8(2.4,1.905)
  silkscreen extent -2.53,-2.5 0.9,2.88, body extent -2,-2.5 2,2.5, height 1.75
SOP65P490X110-9N [mm]
  rrect25% 1.47x0.48 smd: 1(-2.15,0.975) 2(-2.15,0.325) 3(-2.15,-0.325) 4(-2.15,-0.975) 5(2.15,-0.975) 6(2.15,-0.325) 7(2.15,0.325) 8(2.15,0.975)
  rect 1.43x1.76 smd paste-2: 9(0,0)
  silkscreen extent -3.72,-1.55 1.55,1.55, body extent -2.45,-1.5 2.45,1.5, height 1.1
SOT95P280X145-5N [mm]
  rrect25% 1.21x0.59 smd mask+0.05: 1(-1.255,0.95) 2(-1.255,0) 3(-1.255,-0.95) 4(1.255,-0.95) 5(1.255,0.95)
  silkscreen extent -2.5,-1.57 0.8,1.57, body extent -1.4,-1.45 1.4,1.45, height 1.45
"Testpoint pad"#1 [mm] "For Keystone 500x miniature loop terminals"
  round 2 smd: 1(-1,0)
"Testpoint pad"#2 [mm] "For Keystone 500x miniature loop terminals"
  round 2 smd: 1(-0.978,0)
"Testpoint pad"#3 [mm] "For Keystone 500x miniature loop terminals"
  round 2 smd: 1(1,0)
"Testpoint pad"#4 [mm] "For Keystone 500x miniature loop terminals"
  round 2 smd: 1(1.1,0)
"Testpoint pad"#5 [mm] "For Keystone 500x miniature loop terminals"
  round 2 smd: 1(0.978,0)
"Testpoint pad"#6 [mm] "For Keystone 500x miniature loop terminals"
  round 2 smd: 1(0,0)
WE-CBF_0603_L1.6W0.8H0.8_HC [mm] "SMD EMI Suppression Ferrite  Bead, body 1.60x0.80mm"
  rect 0.95x0.7 smd: 1(-0.825,0) 2(0.825,0)
  body extent -0.8,-0.4 0.8,0.4, height 0.8
WE-TVS_SOT23-5L [mm] "TVS Diode, package SOT23-5L"
  rect 0.6x1.1 smd: 1(-0.95,-1.25) 2(0,-1.25) 3(0.95,-1.25) 4(0.95,1.25) 5(-0.95,1.25)
  silkscreen extent -1.68,-1.37 1.45,0.8, body extent -1.45,-1.4 1.45,1.4, height 1.16

## Part data
C1 C5 C10 C13 C15 C18 C19: library part T491A106M016AT, "CAP TANT 10UF 16V 20% 1206", ESR (Equivalent Series Resistance)="7 Ohm", Lifetime @ Temp.="2000 Hrs @ 85°C", Manufacturer=Kemet, Manufacturer Size Code=A, Operating Temperature="-55°C ~ 125°C", Package / Case="1206 (3216 Metric)", Supplier Part Number 1=399-3687-1-ND, Tolerance=±20%, Voltage - Rated=16V, Category=Capacitors, ComponentLink1Description=http://www.kemet.com/Lists/ProductCatalog/Attachments/254/KEM_T2005_T491.pdf, ComponentLink1URL=http://www.kemet.com/Lists/ProductCatalog/Attachments/254/KEM_T2005_T491.pdf, Features="General Purpose", Height - Seated (Max)="0.071\" (1.80mm)", Lead Spacing=-, Manufacturer Part Number=T491A106M016AT, Mounting Type="Surface Mount", Packaging="Cut Tape (CT)", Pricing="1=0.41, 10=0.362, 50=0.2198, 100=0.181, 250=0.14476, 500=0.13184, 1000=0.11891 (USD)", RoHS="RoHS Compliant", Size / Dimension="0.126\" L x 0.063\" W (3.20mm x 1.60mm)", Stock=136950, Supplier 1=Digi-Key, Type=Molded
  C1 C5 C10 C13 C19: Capacitance=10µF
  C15 C18: Capacitance=10uF
C2 C3 C4 C6 C7 C8 C11 C12 C14 C16 C17 C20 C21_C1 C21_C2 C21_C3 C21_C4 C21_C5 C21_C6 C21_C7 C21_C8 C22_C1 C22_C2 C22_C3 C22_C4 C22_C5 C22_C6 C22_C7 C22_C8 C23_C1 C23_C2 C23_C3 C23_C4 C23_C5 C23_C6 C23_C7 C23_C8 C24_C1 C24_C2 C24_C3 C24_C4 C24_C5 C24_C6 C24_C7 C24_C8 C25_C1 C25_C2 C25_C3 C25_C4 C25_C5 C25_C6 C25_C7 C25_C8 C26_C1 C26_C2 C26_C3 C26_C4 C26_C5 C26_C6 C26_C7 C26_C8 C27 C28 C29: library part "C TBD 0603"
C9: library part T495B226K010ATE500, "CAP TANT 22UF 10% 10V 1411", Device Package="1411 (3528 Metric)", ESR (Equivalent Series Resistance)="500mOhm @ 100kHz", Lifetime @ Temp.="2000 Hrs @ 125°C", Manufacturer=KEMET, Manufacturer Size Code=B, Operating Temperature="-55°C ~ 125°C", Supplier Part Number 1=399-18339-1-ND, Tolerance=±10%, Voltage - Rated="10 V", Capacitance="22 µF", ComponentLink1Description=Datasheet, ComponentLink1URL=https://api.kemet.com/component-edge/download/datasheet/T495B226K010ATE500.pdf, ComponentLink2Description="DigiKey Link", ComponentLink2URL=https://www.digikey.com/en/products/detail/kemet/T495B226K010ATE500/8763592, Features="General Purpose", Height - Seated (Max)="0.083\" (2.10mm)", lastupdated="6/3/2024 7:29:03 PM", Lifecycle Status=Active, Minimum Order=1, Mounting Type="Surface Mount", Package / Case="1411 (3528 Metric)", Packaging=TapeAndReel, Part Number=T495B226K010ATE500, Part Status=Active, partid=6, Price=0.50, Series=T495, Size / Dimension="0.138\" L x 0.110\" W (3.50mm x 2.80mm)", Supplier 1=DigiKey, Type=Molded
D1 D2: library part CMP-1060-00706-2, "DIODE ZENER 5.6V 300MW SOD323", Case/Package=SOD-323-2, Forward Voltage=900mV, Max Operating Temperature=150°C, Max Power Dissipation=200mW, Max Reverse Leakage Current=1uA, Min Operating Temperature=-65°C, Package Quantity=1, Test Current=5mA, Tolerance=2%, Voltage Rating (DC)=5.6V, Zener Current=10mA, Contact Plating=Tin, Element Configuration=Single, ESD Protection=Yes, Height=1mm, Impedance=40R, Lead Free="Lead Free", Length=1.8mm, Material=Plastic, Number of Pins=2, Packaging="Tape and Reel", Peak Reverse Current=1uA, Power Dissipation=200mW, Power Rating=200mW, Radiation Hardening=No, REACH SVHC="No SVHC", Voltage Tolerance=2%, Width=1.35mm, Working Voltage=5.6V, Zener Voltage=5.6V
D3: "LED GREEN CLEAR 0603 SMD", Color=Green, Current - Test=20mA, Lens Color=Colorless, Manufacturer="Lite-On Inc.", Millicandela Rating=35mcd, Package / Case="0603 (1608 Metric)", Supplier Part Number 1=160-1435-1-ND, Voltage - Forward (Vf) (Typ)=2V, Category=Optoelectronics, ComponentLink1Description=http://optoelectronics.liteon.com/upload/download/DS22-2000-074/S_110_LTST-C190KGKT.pdf, ComponentLink1URL=http://optoelectronics.liteon.com/upload/download/DS22-2000-074/S_110_LTST-C190KGKT.pdf, Height (Max)=0.80mm, Lens Style/Size="Rectangle with Flat Top, 1.10mm x 0.80mm", Lens Transparency=Clear, Manufacturer Part Number=LTST-C190KGKT, Mounting Type="Surface Mount", Packaging="Cut Tape (CT)", Pricing="1=0.24, 10=0.186, 100=0.1015, 250=0.06768, 500=0.05752, 1000=0.04399 (USD)", RoHS="RoHS Compliant", Size / Dimension="1.60mm L x 0.80mm W", Stock=632012, Supplier 1=Digi-Key, Supplier 2=Mouser, Supplier Part Number 2=859-LTST-C190KGKT, Viewing Angle=130°, Wavelength - Dominant=571nm, Wavelength - Peak=574nm
D4: library part "LB Q39G-L2N2-35-1", "LED BLUE DIFFUSED 0603 SMD", Color=blue, Current - Test=5mA, Lens Color=White, Manufacturer=OSRAM, Millicandela Rating=29.5mcd, Package / Case="0603 (1608 Metric)", Supplier Part Number 1=475-2816-1-ND, Value1=W, Value2=2.85V, Category=Optoelectronics, ComponentLink1Description="Datasheet link", ComponentLink1URL=http://catalog.osram-os.com/catalogue/catalogue.do;jsessionid=8F4D5D14036503CDC6D844D9AC77EBC1?act=downloadFile&favOid=02000006000372cb000100b6, ComponentLink2Description=http://media.digikey.com/pdf/Data%20Sheets/Osram%20PDFs/LB_LT%20Q39G.pdf, ComponentLink2URL=http://media.digikey.com/pdf/Data%20Sheets/Osram%20PDFs/LB_LT%20Q39G.pdf, CompType=LED, Height (Max)=0.40mm, Io_A=0.15, LatestRevisionDate=2015-04-28, Lens Style/Size="Rectangle with Flat Top, 1.10mm x 0.80mm", Lens Transparency=Diffused, Manufacturer Part Number="LB Q39G-L2OO-35-1", Mounting Type="Surface Mount", MountType=SMT, PackageReference="BLUE 0603 LED", Packaging="Cut Tape (CT)", PartNumber="LB Q39G-L2N2-35-1", Pricing="1=0.38, 10=0.266, 25=0.2184, 100=0.1746, 250=0.13092, 500=0.11902, 1000=0.09522 (USD)", Published=2008-07-11, Publisher="Texas Instruments", RoHS=Y, Size / Dimension="1.60mm L x 0.80mm W", Stock=53859, Supplier 1=Digi-Key, Supplier 2=Mouser, Supplier Part Number 2=720-LBQ39GL2N2351, SymbolVersion=2008-12-08, Tjmax_C=95, Type=?, U/M=EA, Vf_V=2.85, Viewing Angle="155°, 135°", Voltage - Forward (Vf) (Typ)=2.85V, Wavelength - Dominant=470nm, Wavelength - Peak=472nm
D5: library part 824011, "WE-TVS TVS Diode – High Speed Series, SOT23-5L, 2+1 Channel, 5V, 2pF", (Reverse) Breakdown Voltage=6.1V, (Reverse) Peak Pulse Current=13A, Case/Size Code=SOT23-5L, Channel ESD Clamping Voltage=13V, Channel Input Capacitance=2pF, Channel Reverse Leakage Current=1uA, Manufacturer="Wurth Elektronik", Operating Temperature Max=125°C, Operating Temperature Min=-55°C, Category="ESD Protection", Channel Operating Voltage=5V, ComponentLink1Description="Website Link", ComponentLink1URL=https://www.we-online.com/redexpert/article/824011?ad, ComponentLink2Description="Datasheet Link", ComponentLink2URL=https://www.we-online.com/redexpert/spec/824011?ad, ESD Air Discharge Capability=24kV, ESD Contact Discharge Capability=16kV, Height=1.16mm, Length=2.9mm, Manufacturer Part Number=824011, Match Code=WE-TVS, Mount="Surface Mount", Number of Channels=2+1, Packaging="Tape and Reel", Polarity=Unidirectional, Width=2.8mm
FB1 FB2: library part CMP-0686-00581-3, "Chip Ferrite Bead, 0603, 600Ω @ 100MHz, 0.15Ω, 25%, 1.3A", Case Code (Imperial)=0603, Case Code (Metric)=1608, Current Rating=1.3A, DC Resistance (DCR)=150mR, Inductor Type="FERRITE BEAD", Max Operating Temperature=125°C, Min Operating Temperature=-55°C, Package Quantity=1, Test Frequency=100MHz, Tolerance=25%, Case/Package=0603, Core Material=Ferrite, DC Current=1.3A, Depth=0.8mm, Height=0.8mm, Impedance=600R, Lead Free="Lead Free", Length=1.6mm, Material=Steel, Max Current Rating=1.3A, Max DC Current=1.3A, Military Standard=Not, Number of Circuits=1, Number of Lines=1, Number of Pins=2, Packaging="Tape and Reel", Radiation Hardening=No, REACH SVHC="No SVHC", RoHS Compliant=Yes, Series=BLM18K, Termination=SMD/SMT, Weight=7.1E-05oz, Width=0.8mm
FB3 FB4 FB5: library part CMP-0220-00193-3, Case Code (Imperial)=0603, Case Code (Metric)=1608, Case/Package=SMD/SMT, Current Rating=3A, DC Resistance (DCR)=40mΩ, Inductance=5.6H, Max Operating Temperature=125°C, Min Operating Temperature=-55°C, Test Frequency=100MHz, Tolerance=25%, Core Material=Ferrite, Depth=800µm, Height=800µm, Impedance=30Ω, Length=1.6mm, Material=Ferrite, Max Current Rating=3A, Max DC Current=3A, Mount="Surface Mount", NexarPartId=8916973, Number of Lines=1, Packaging=Digi-Reel®, REACH SVHC=Unknown, Resistance=40mΩ, RMS Current (Irms)=3A, RoHS=Compliant, Series Resistance=40mΩ, Termination=SMD/SMT, Weight=3.997283mg, Width=800µm
J1: "3 µin Plating Thickness, White Insulator, USB Receptacle", Package=None, Availability=Unavailable, MF="{'manufacturer': u'CUI'}", MP=UJ2-BH-W1-TH, Price=None
J2: "No Description Available", Mfr_Name="Samtec Inc", RefDes=RefDes, Type=Type
J3: library part CMP-15831-000009-1, "CONN HEADER VERT 2POS 2.54MM", Current Rating=3A, Manufacturer=Harwin, Temperature="-40°C to +105°C", Temperature Range High=+105°C, Temperature Range Low=-40°C, Automotive=No, Category=Conn, ComponentLink2Description=Datasheet, ComponentLink2URL=https://cdn.harwin.com/pdfs/M20-999.pdf, Conn Gender=Male, Conn Orientation=Vertical, Contact Material=Tin,Nickel, Device Class L1=Connectors, Device Class L2="Headers and Wire Housings", Device Class L3=unset, Digikey Description="CONN HEADER VERT 2POS 2.54MM", Height=8.99mm, Lead Free=Yes, Manufacturer Part Number=M20-9990246, Mouser Description="2.54mm (0.1\") Pitch SIL Vertical PC Tail Pin Header, 6.1mm mating pin height, tin, 2 contacts", Number Of Contacts=2, Number Of Rows=1, Octopart=https://octopart.com/m20-9990246-harwin-2590635, Package=M20-9990246, Pitch=2.54mm, RoHS=TRUE
NT: "NET_TIE FOR EDGE"
Q1: library part CMP-12801-000065-1, "MOSFET P-CH 20V 3A SOT23", Continuous Drain Current=-3A, Drain To Source Breakdown Voltage=-20V, Drain To Source Resistance=120mΩ, Gate To Source Voltage=8V, Input Capacitace At Vds="476pF @ -10V", Manufacturer="Diodes Inc.", Max Forward Diode Voltage=-1.2V, Max Junction Temp=+150°C, Package=SOT23, Power Dissipation=1.5W, Pulse Drain Current=-10A, Temperature="-55°C to +150°C", Temperature Range Low=-55°C, Automotive=No, Category=Trans, ComponentLink2Description=Datasheet, ComponentLink2URL=https://www.diodes.com/assets/Datasheets/DMG2301L.pdf, Depletion Mode=False, Device Class L1="Discrete Semiconductors", Device Class L2=Transistors, Device Class L3=MOSFETs, Digikey Description="MOSFET P-CH 20V 3A SOT23", Drain To Source Voltage=-20V, Footprint Url=https://www.diodes.com/assets/Package-Files/SOT23.pdf, Gate Charge At Vgs="5.5nC @ -4.5V", Height=1.1mm, Lead Free=Yes, Manufacturer Part Number=DMG2301L-7, Mouser Description="Single P-Channel 20 V 1.5 W 5.5 nC Silicon Surface Mount Mosfet - SOT-23", Number of Channels=1, Number Of P Channels=1, Octopart=https://octopart.com/dmg2301l-7-diodes+inc.-67250456, RoHS=TRUE, Rthja Max=83°C/W, Standoff Height=0.013mm, Temperature Range High=+150°C, Threshold Vgs Max=-1.2V, Threshold Vgs Min=-0.4V, Turn Off Delay Time=30ns, Turn On Delay Time=5ns
R1 R2 R3 R4 R5 R6 R7 R8 R9_C1 R9_C2 R9_C3 R9_C4 R9_C5 R9_C6 R9_C7 R9_C8 R10_C1 R10_C2 R10_C3 R10_C4 R10_C5 R10_C6 R10_C7 R10_C8 R12_C1 R12_C2 R12_C3 R12_C4 R12_C5 R12_C6 R12_C7 R12_C8 R13_C1 R13_C2 R13_C3 R13_C4 R13_C5 R13_C6 R13_C7 R13_C8: library part "R TBD 0603"
R11_C1 R11_C2 R11_C3 R11_C4 R11_C5 R11_C6 R11_C7 R11_C8: library part "R TBD 0805"
TP1 TP2 TP3 TP4 TP5 TP6 TP7 TP8 TP9 TP10 TP11 TP12 TP13 TP14 TP15 TP16 TP17_C1 TP17_C2 TP17_C3 TP17_C4 TP17_C5 TP17_C6 TP17_C7 TP17_C8: "TEST POINT PC MINI .040\"D BLACK", Color=Black, Manufacturer="Keystone Electronics", Supplier Part Number 1=36-5001-ND, Category="Test and Measurement", ComponentLink1Description=http://www.keyelco.com/product-pdf.cfm?p=1310, ComponentLink1URL=http://www.keyelco.com/product-pdf.cfm?p=1310, Manufacturer Part Number=5001, Material="Base, Nylon 46, UL 94V-0", Mounting Type="0.040\" (1.02mm) Hole Diameter", Packaging=Bulk, Pricing="1=0.36, 10=0.327, 50=0.238, 100=0.2286, 250=0.20528, 500=0.19594, 1000=0.16328, 2500=0.14928, 5000=0.13995 (USD)", RoHS="RoHS Compliant", Stock=443864, Supplier 1=Digi-Key, Terminal="0.010\" x 0.020\" (0.25mm x 0.51mm) Phosphor Bronze Wire, Silver Plated", Type="PC Test Point, Miniature"
U2: library part CMP-0162-00225-1, "1K, 128x8 or 64x16-bit, 5.0V Microwire Serial EEPROM, 8-Pin SOIC 150mil, Industrial Temperature", Code_IPC=SOIC127P600-8, Code_JEDEC=MS-012, DatasheetVersion="revG, May-2008", PackageDescription="8-Lead Plastic Small Outline (SN) - Narrow, 3.90mm Body [SOIC]", PackageReference=SOIC-SN8, PackageVersion="revBB, Aug-2009"
U3_C1 U3_C2 U3_C3 U3_C4 U3_C5 U3_C6 U3_C7 U3_C8: "3.1-W, mono, analog input Class-AB audio amplifier", Package="HVSSOP-8 Texas Instruments", Check_prices=https://www.snapeda.com/parts/TPA6211A1DGN/Texas+Instruments/view-part/?ref=eda, MF="Texas Instruments", MP=TPA6211A1DGN, SnapEDA_Link=https://www.snapeda.com/parts/TPA6211A1DGN/Texas+Instruments/view-part/?ref=snap
U4_C1 U4_C2 U4_C3 U4_C4 U4_C5 U4_C6 U4_C7 U4_C8: "26V, 350kHz current sense amplifier", Package="SOT-23-5 Texas Instruments", Availability="In Stock", Check_prices=https://www.snapeda.com/parts/INA180A1IDBVT/Texas+Instruments/view-part/?ref=eda, MF="Texas Instruments", MP=INA180A1IDBVT, Price=None, Purchase-URL=https://pricing.snapeda.com/search/part/INA180A1IDBVT/?ref=eda, SnapEDA_Link=https://www.snapeda.com/parts/INA180A1IDBVT/Texas+Instruments/view-part/?ref=snap
U5: "500-mA, low-IQ, high-accuracy, adjustable ultra-low-dropout voltage regulator with enable", Package="SOT-23-5 Texas Instruments", Check_prices=https://www.snapeda.com/parts/TLV75801PDBVR/Texas+Instruments/view-part/?ref=eda, MF="Texas Instruments", MP=TLV75801PDBVR, SnapEDA_Link=https://www.snapeda.com/parts/TLV75801PDBVR/Texas+Instruments/view-part/?ref=snap
U6: "- ESP32-C3 Transceiver; 802.11 a/b/g/n (Wi-Fi, WiFi, WLAN), BluetoothÂ® Smart 4.x Low Energy (BLE) 2.4GHz Evaluation Board", Package=None, Availability="In Stock", Check_prices=https://www.snapeda.com/parts/113991054/Seeed+Technology+Co.%252C+Ltd/view-part/?ref=eda, MF="Seeed Technology Co., Ltd", MP=113991054, Price=None, Purchase-URL=https://pricing.snapeda.com/search/part/113991054/?ref=eda, SnapEDA_Link=https://www.snapeda.com/parts/113991054/Seeed+Technology+Co.%252C+Ltd/view-part/?ref=snap
U7: library part CMP-12756-000001-1, "IC REG LINEAR 3.3V 300MA SOT23-5", Ambient Temperature Range High=+85°C, Ambient Temperature Range Low=-40°C, Dropout Voltage=170mV, Manufacturer="Diodes Inc.", Max Junction Temp=+150°C, Max Supply Voltage=6V, Min Supply Voltage=2.5V, Nominal Supply Current=60uA, Output Current=400mA, Output Voltage=3.3V, Package=SOT25, Temperature="-40°C to +85°C", Accuracy Percentage=2%, Automotive=No, Category=IC, ComponentLink2Description=Datasheet, ComponentLink2URL=https://www.diodes.com/assets/Datasheets/AP2127.pdf, Device Class L1="Integrated Circuits (ICs)", Device Class L2="Power Management ICs", Device Class L3="Voltage Regulators - Linear", Digikey Description="IC REG LINEAR 3.3V 300MA SOT23-5", Footprint Url=https://www.diodes.com/assets/Package-Files/SOT25.pdf, Height=1.4mm, Lead Free=Yes, Manufacturer Part Number=AP2127K-3.3TRG1, Mouser Description="LDO Voltage Regulators 300mA CMOS LDO 2.5V to 6V", Number Of Outputs=1, Octopart=https://octopart.com/ap2127k-3.3trg1-diodes+inc.-30954597, Output Type=Fixed, RoHS=TRUE, Standoff Height=0.013mm, Temperature Range High=+85°C, Temperature Range Low=-40°C
X1: "No Description Available", Mfr_Name="ECS International", RefDes=RefDes, Type=Crystals

## Free pads (board coordinates)
  round 4 hole 3: 2(3,4) 2(50,4) 2(50,56)

## Via types
v1: diameter 0.6, hole 0.35, Top Layer to Bottom Layer, 97 vias
v2: diameter 0.55, hole 0.3, Top Layer to Bottom Layer, 40 vias
v3: diameter 0.45, hole 0.2, Top Layer to Bottom Layer, 9 vias
v4: diameter 1.27/1.27/1.27/1.27 (per signal layer), hole 0.6, Top Layer to Bottom Layer, 2 vias

## Nets (pads, with @x,y where several pads share a name; then routed paths per layer and width w, separated by ;. In a path a pad name is that pad's centre, name@x,y a point inside that pad or via, vN(x,y) a via of type N, cw(c..) or ccw(c..) an arc to the next point about the centre after c; other vN are vias at no path point)
3V3: C28.2 C29.2 U6.12 U7.5 | length 23.2
  Top Layer w0.203: U7.5@15,13.85 16.95,13.85 C28.2@17.1,13.7 24.1,13.7 v1(29.9,7.9)
  Bottom Layer w0.203: C29.2@29.112,2.388 29.112,4.952 29.9,5.74 v1(29.9,7.9)
4V: C11.2 JP1.3 R6.2 U5.5 | length 11.3
  Top Layer w0.508: U5.5@8.155,26.15 9.95,26.15 C11.2@10.3,26.5 ; R6.2@10.3,24.7 C11.2@10.3,26.5 ; JP1.3@16.3,26.9 16.3,26.925 15.125,28.1 11.925,28.1 10.325,26.5 C11.2@10.3,26.5
AGND: C1.1 C2.1 C9.2 C11.1 C12.1 C15.1 C16.1 C17.1 C18.1 C21_C1.1 C21_C2.1 C21_C3.1 C21_C4.1 C21_C5.1 C21_C6.1 C21_C7.1 C21_C8.1 C23_C1.1 C23_C2.1 C23_C3.1 C23_C4.1 C23_C5.1 C23_C6.1 C23_C7.1 C23_C8.1 C24_C1.1 C24_C2.1 C24_C3.1 C24_C4.1 C24_C5.1 C24_C6.1 C24_C7.1 C24_C8.1 C25_C1.1 C25_C2.1 C25_C3.1 C25_C4.1 C25_C5.1 C25_C6.1 C25_C7.1 C25_C8.1 C26_C1.1 C26_C2.1 C26_C3.1 C26_C4.1 C26_C5.1 C26_C6.1 C26_C7.1 C26_C8.1 C27.1 C28.1 C29.1 D2.2 FB3.2 FB4.2 J3.2 NT.2 pad.2 R7.1 U1.22 U1.30 U1.42 U3_C1.7 U3_C1.9 U3_C2.7 U3_C2.9 U3_C3.7 U3_C3.9 U3_C4.7 U3_C4.9 U3_C5.7 U3_C5.9 U3_C6.7 U3_C6.9 U3_C7.7 U3_C7.9 U3_C8.7 U3_C8.9 U4_C1.2 U4_C2.2 U4_C3.2 U4_C4.2 U4_C5.2 U4_C6.2 U4_C7.2 U4_C8.2 U5.2 U6.13 U7.2 | length 184.6
  Top Layer w0.203: J3.2@2.4,12.73 6.325,12.73 7.1,11.955 C12.1@7.1,11.93 9.17,11.93 9.421,11.679 9.421,11.399 9.719,11.102 9.763,11.102 9.764,11.1 10.9,11.1 ; C11.1@11.9,26.5 13.02,26.5 13.22,26.7 v1(13.3,26.7) ; U7.2@12.553,12.9 12.532,12.879 11.935,12.879 10.356,11.3 10.7,11.3 10.9,11.1 ; C28.1@17.1,12.1 16.839,11.839 16.439,11.839 15.7,11.1 10.9,11.1 ; v1(21.1,29.2) 22.175,29.2 FB4.2@22.2,29.175 FB3.2@24,29.175 ; v1(28.913,27.7) 30,27.7 30,27.675 31.295,26.38 32.4,26.38 32.527,26.507 C9.2@35.473,26.507 ; U1.22@31.973,35.88 33.983,35.88 ; v1(36,32.2) 35.987,32.213 35.987,33.367 35.925,33.428 35.925,33.975 35.7,34.2 35.663,34.2 33.983,35.88 ; U1.42@40.473,37.38 40.425,37.332 39.632,37.332 38.2,35.9 34.003,35.9 33.983,35.88 ; C15.1@41.01,27.4 C15.1@40.8,27.19 41.69,27.19 42.539,28.039 42.978,28.039 C16.1@43.158,28.219 ; v1(51.478,10.326) 51.549,10.326 51.906,9.969 51.933,9.969 52.745,9.156 C24_C4.1@52.77,9.156 ; v1(52.4,24.2) 52.829,23.771 52.829,22.967 C24_C3.1@52.793,22.931 ; v1(52.4,38.775) 52.83,38.345 52.83,37.468 C24_C2.1@52.793,37.431 ; v1(52.4,54.171) 52.793,53.779 C24_C1.1@52.793,52.931 ; v1(54.948,38.671) 55.503,38.671 55.533,38.701 55.812,38.701 C25_C2.1@56.185,39.074 ; v1(55.028,10.397) 55.431,10.8 C25_C4.1@56.163,10.8 ; v1(55.05,24.171) 55.453,24.574 C25_C3.1@56.185,24.574 ; v1(55.05,54.171) 55.453,54.574 C25_C1.1@56.185,54.574 ; C26_C4.1@57.807,3.314 58.18,2.94 58.834,2.94 59.246,2.529 v1(59.278,2.529) ; v1(57.829,13.7) 57.829,14.445 58,14.616 58,15.28 57.878,15.402 C26_C3.1@57.878,17.088 ; C26_C2.1@57.829,31.588 57.8,31.559 57.8,27.915 v1(57.852,27.864) ; C26_C1.1@57.829,47.088 58.7,46.217 v1(58.7,42.7) ; U3_C2.9@63.385,38.274 63.385,38.213 U3_C2.9@63.498,38.099 ; U3_C4.7@65.013,9.825 65.016,9.822 66.328,9.822 v1(66.331,9.819) ; U3_C3.7@65.035,23.599 66.158,23.599 66.333,23.774 v1(66.4,23.774) ; U3_C2.7@65.035,38.099 65.038,38.097 66.382,38.097 v1(66.384,38.094) ; U3_C1.7@65.035,53.599 v1(66.387,53.599) ; v1(66.236,5.147) 66.302,5.213 v1@66.302,5.236 ; v1(66.258,18.922) 66.217,18.963 v1@66.217,19.118 ; v1(66.258,33.422) 66.382,33.422 66.382,33.405 66.441,33.346 66.489,33.346 66.935,32.9 U4_C2.2@67.245,32.9 ; v1(66.258,48.922) v1@66.437,49.1 ; v1@66.382,33.486 66.277,33.59 66.277,34.026 66.452,34.201 66.452,35.167 C23_C2.1@67.585,36.3 ; U4_C4.2@67.223,4.626 66.913,4.626 v1@66.302,5.236 ; U4_C3.2@67.245,18.4 66.935,18.4 v1@66.217,19.118 ; U4_C1.2@67.245,48.4 66.935,48.4 66.437,48.898 66.437,49.686 67.585,50.834 C23_C1.1@67.585,51.8 67.61,51.8 68.787,52.977 68.787,53.221 69.16,53.594 C21_C1.1@69.185,53.594 ; C23_C2.1@67.652,36.587 67.888,36.587 67.975,36.673 67.975,36.909 69.16,38.094 C21_C2.1@69.185,38.094 ; C21_C4.1@69.163,9.82 69.138,9.82 67.961,8.643 67.961,8.399 67.588,8.026 C23_C4.1@67.563,8.026 67.563,7.205 66.271,5.914 66.271,5.267 v1@66.302,5.236 ; C21_C3.1@69.185,23.594 69.16,23.594 67.983,22.418 67.983,22.173 67.61,21.8 C23_C3.1@67.585,21.8 67.56,21.8 67.187,21.427 67.187,21.402 66.217,20.432 v1@66.217,19.118
  Top Layer w0.508: U5.2@5.645,25.2 6.5,25.2 6.619,25.081 6.619,19.881 C2.1@6.7,19.8 8.487,19.8 9,20.313 C1.1@9,20.41 ; R7.1@10.3,22.9 10.275,22.9 9,21.625 C1.1@9,20.41 ; D2.2@11.4,20.115 9.295,20.115 C1.1@9,20.41
  GND w0.203: 26.781,30.414 26.9,30.533
  GND w2: 14.7,31.1 NT.2@14.7,31.817
  Bottom Layer w0.203: U6.13@27.32,5.7 27.7,5.32 C29.1@27.7,2.4 ; C29.1@27.5,2.4 27.5,2.232 C29.1@27.7,2.032 ; v1(51.478,10.326) 51.478,10.245 51.792,9.931 51.792,9.711 52.004,9.499 52.404,9.499 C24_C8.1@52.778,9.126 ; v1(52.4,24.2) 52.8,23.8 C24_C7.1@52.8,22.9 ; v1(52.4,38.775) 52.8,38.375 C24_C6.1@52.8,37.4 ; v1(52.4,54.171) 52.8,53.771 C24_C5.1@52.8,52.9 ; v1(54.568,48.888) 54.649,48.888 54.762,48.775 C25_C5.1@56.65,48.775 ; v1(54.9,18.888) 54.98,18.888 55.094,18.775 C25_C7.1@56.65,18.775 ; v1(54.9,33.2) 56.575,33.2 C25_C6.1@56.65,33.275 ; v1(55.252,5.299) 56.329,5.299 C25_C8.1@56.628,5.001 ; v1(57.829,13.7) 57.829,12.624 58.203,12.251 C26_C8.1@58.228,12.251 ; v1(57.852,27.864) 57.852,26.398 58.225,26.025 C26_C7.1@58.25,26.025 ; C26_C6.1@58.25,40.525 58.275,40.525 58.648,40.898 58.648,42.648 v1(58.7,42.7) ; C26_C5.1@58.25,56.025 58.623,55.652 59.268,55.652 59.42,55.5 v1(59.5,55.5) ; U3_C6.9@63.385,33.483 63.385,33.545 U3_C6.9@63.498,33.658 ; U3_C8.7@65.013,5.384 65.151,5.245 66.03,5.245 66.128,5.147 v1(66.236,5.147) ; U3_C7.7@65.035,19.158 65.173,19.02 66.052,19.02 66.151,18.922 v1(66.258,18.922) ; U3_C6.7@65.035,33.658 65.173,33.52 66.052,33.52 66.151,33.422 v1(66.258,33.422) ; U3_C5.7@65.035,49.158 65.173,49.02 66.052,49.02 66.151,48.922 v1(66.258,48.922) ; v1@66.302,9.825 66.386,9.909 66.386,10.526 67.139,11.279 U4_C8.2@67.449,11.279 ; v1(66.331,9.819) 66.358,9.793 66.358,9.397 67.204,8.551 C23_C8.1@68.328,8.551 68.328,7.351 69.753,5.926 C21_C8.1@69.778,5.926 ; U4_C7.2@67.471,25.053 67.161,25.053 66.412,24.304 66.412,23.787 v1(66.4,23.774) 67.476,22.698 67.977,22.698 C23_C7.1@68.35,22.325 68.672,22.003 68.672,21.664 69.8,20.536 C21_C7.1@69.8,19.7 ; U4_C6.2@67.471,39.553 67.161,39.553 66.968,39.36 66.349,38.741 66.349,38.13 v1(66.384,38.094) 67.28,37.198 67.977,37.198 C23_C6.1@68.35,36.825 ; U4_C5.2@67.471,55.053 67.161,55.053 66.414,54.306 66.414,53.627 v1(66.387,53.599) 66.387,53.513 67.575,52.325 68.375,52.325 68.88,51.82 68.88,51.701 69.8,50.782 C21_C5.1@69.8,49.7 ; C23_C6.1@68.358,36.842 68.748,36.452 68.748,36.33 69.8,35.279 C21_C6.1@69.8,34.2
  other v1: 27.7,3.6 6.6,22.8 42.1,27.6
  other v2: 62.463,5.109 63.263,5.109 62.863,5.709 62.463,6.309 63.263,6.309 62.463,8.9 63.263,8.9 62.863,9.5 62.463,10.1 63.263,10.1 62.485,18.883 63.285,18.883 62.885,19.483 62.485,20.083 63.285,20.083 62.485,22.674 63.285,22.674 62.885,23.274 62.485,23.874 63.285,23.874 62.485,33.383 63.285,33.383 62.885,33.983 62.485,34.583 63.285,34.583 62.485,37.174 63.285,37.174 62.885,37.774 62.485,38.374 63.285,38.374 62.485,48.883 63.285,48.883 62.885,49.483 62.485,50.083 63.285,50.083 62.485,52.674 63.285,52.674 62.885,53.274 62.485,53.874 63.285,53.874